# Altium PCB Main.PcbDoc
Units mm, origin at the board's own origin, x right, y up, seen from the top; angles counter-clockwise.
Board outline 99 x 64 mm, 4 copper layers (Top Layer, Ground Layer, Power Layer, Bottom Layer), stack 1.591 mm thick; 86 components, 76 nets, 354 pads, 86 vias.
Unrouted connection lines stored in the file: 1.
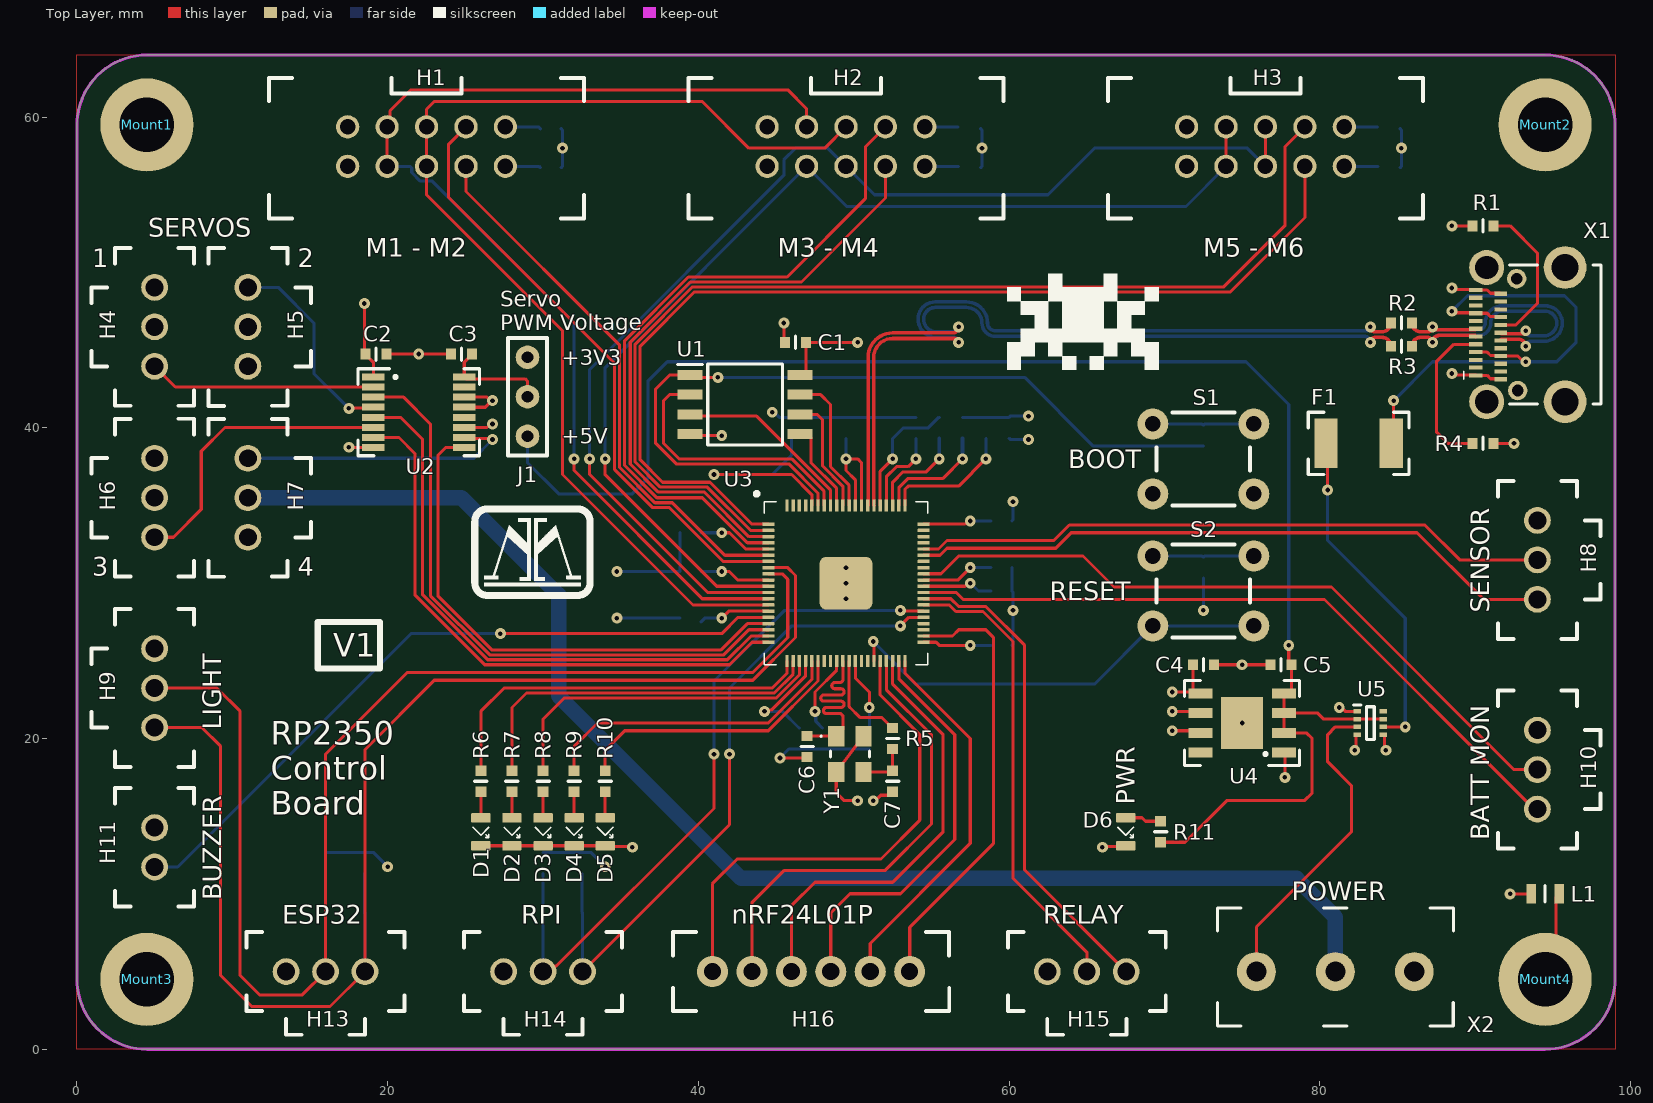
[diagram p0: Top Layer view]
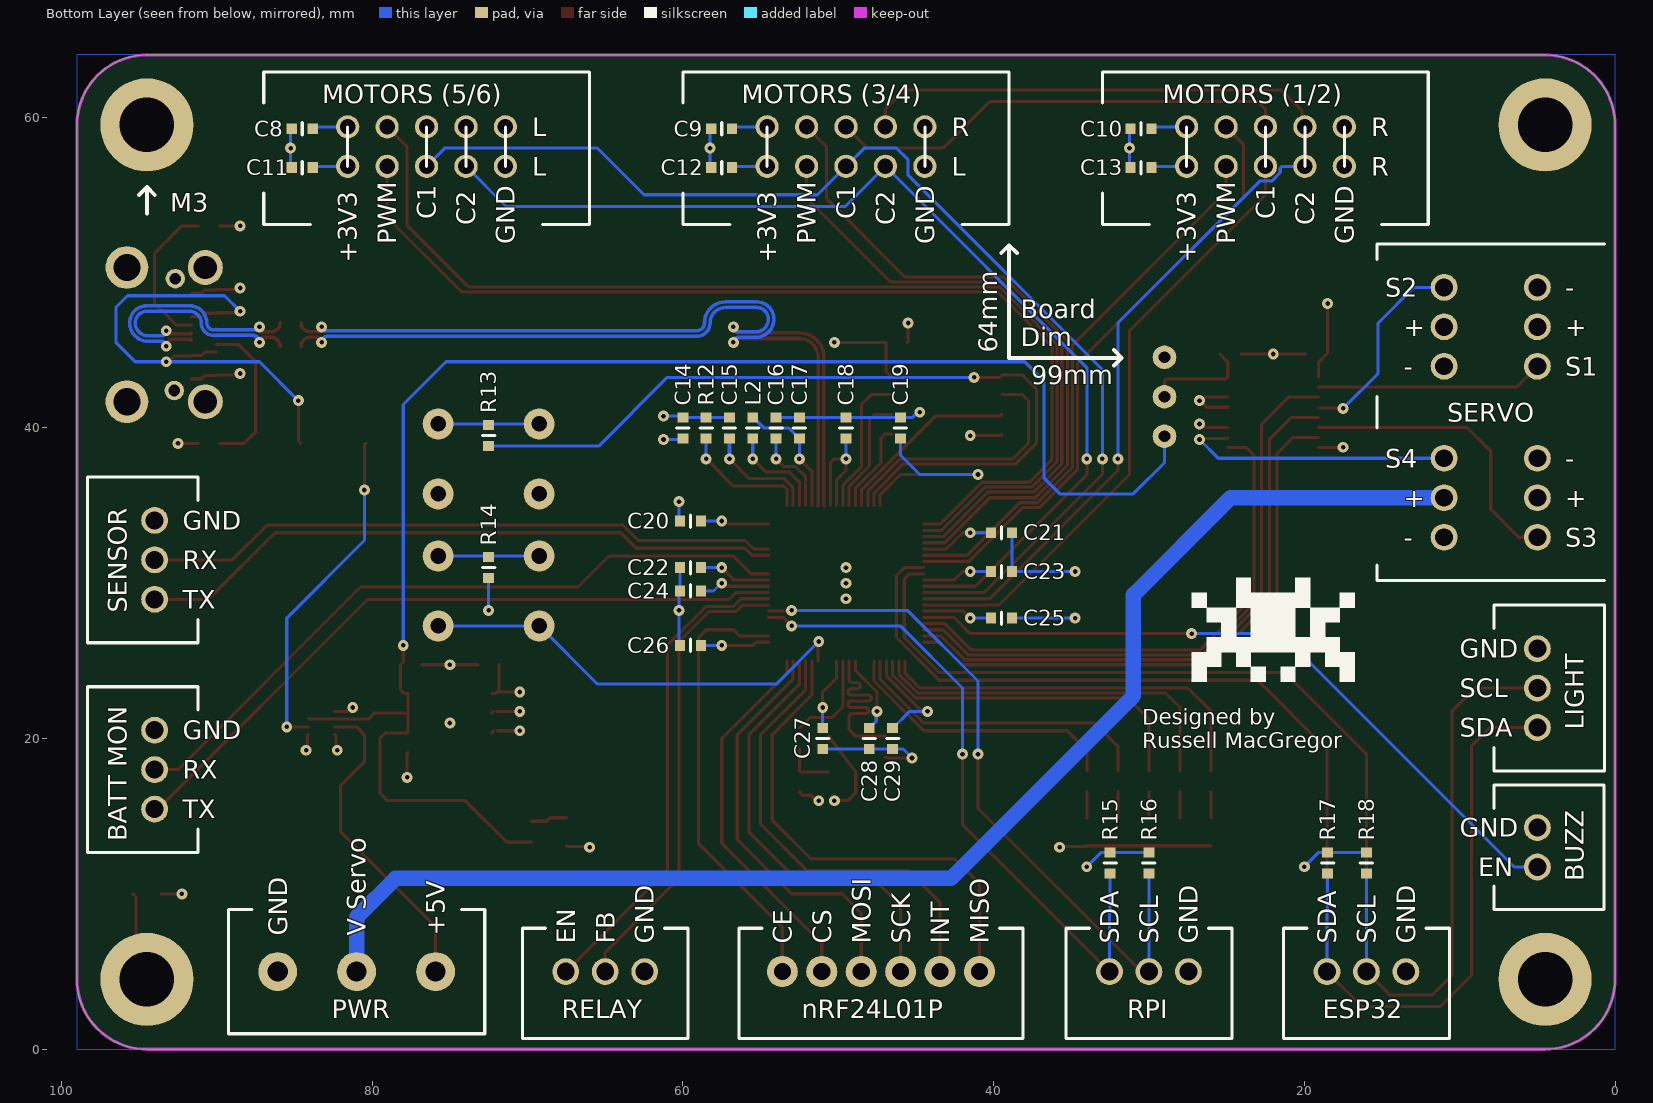
[diagram p1: Bottom Layer view, seen from below]
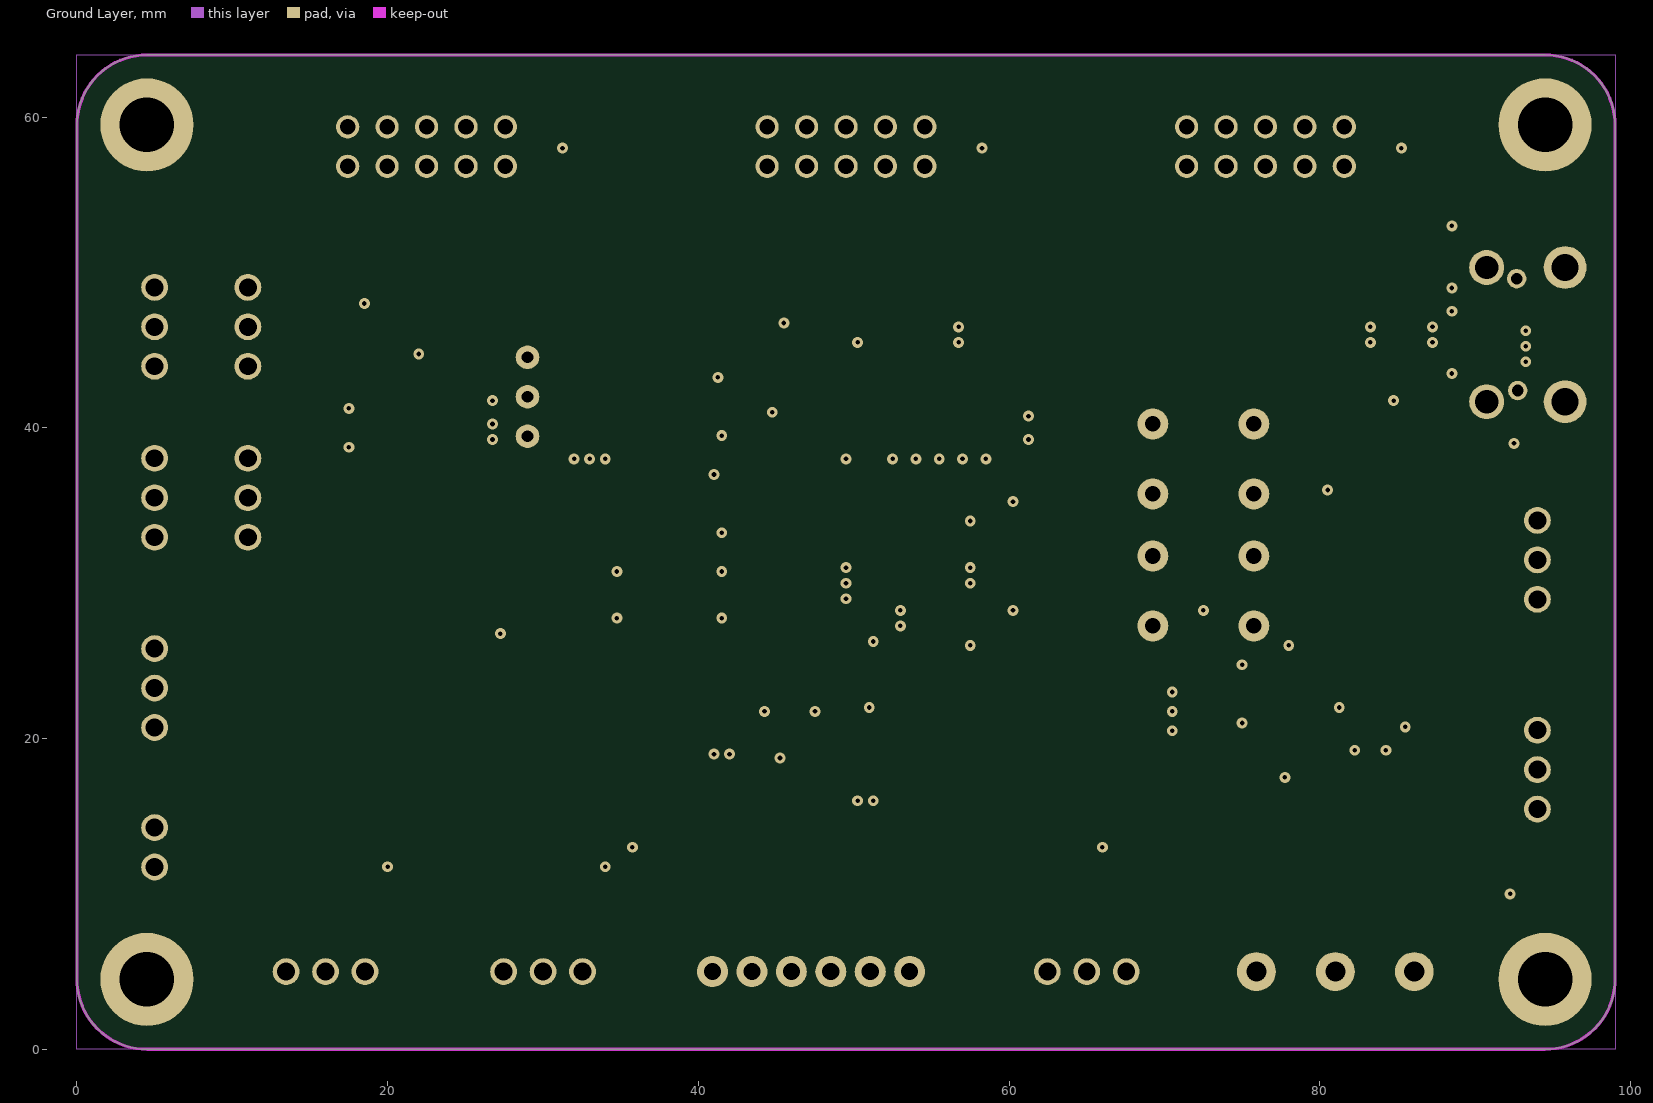
[diagram p2: Ground Layer]
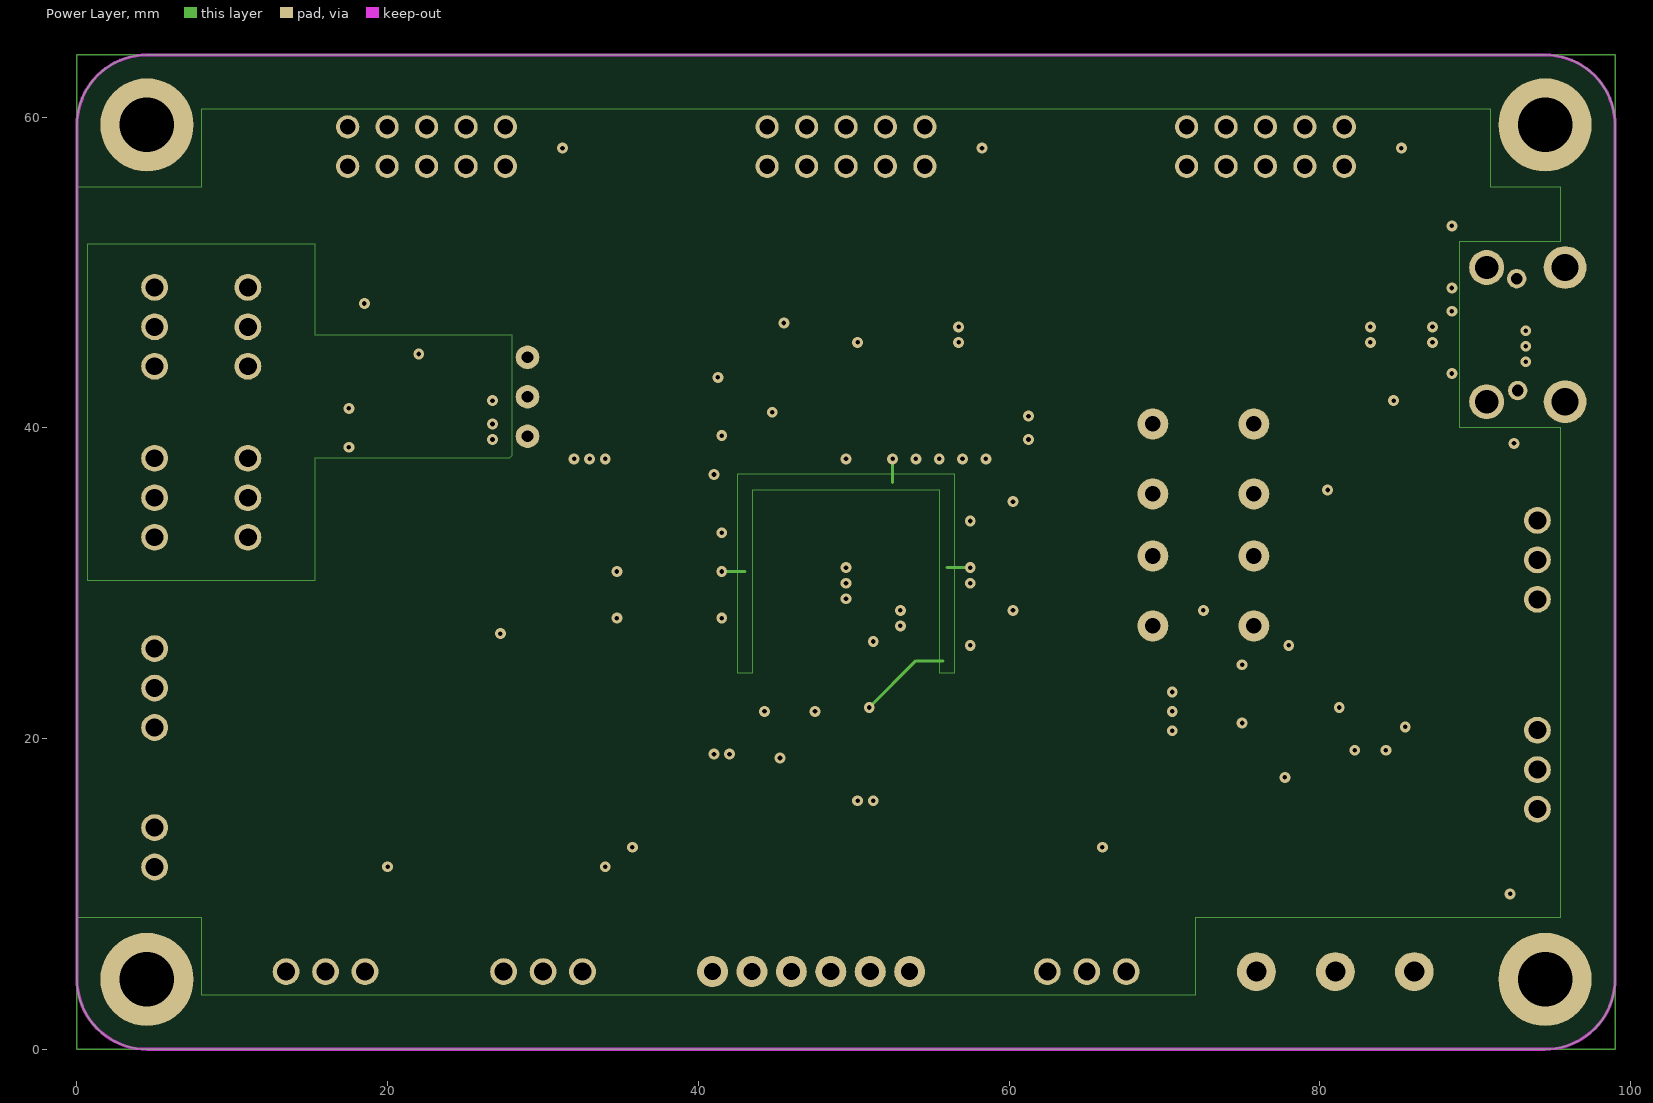
[diagram p3: Power Layer]
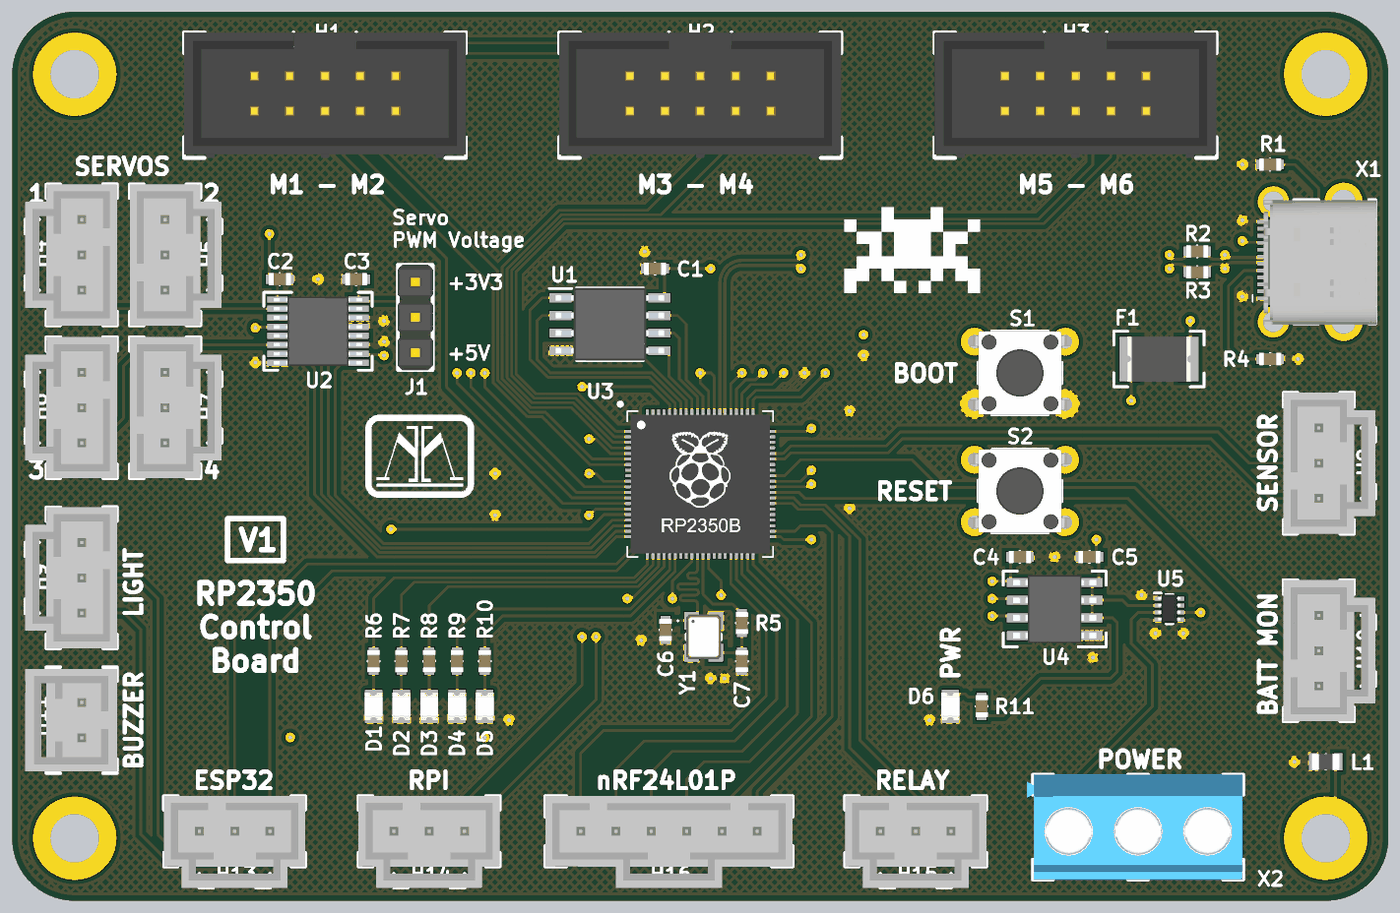
[diagram p4: 3D render of the assembled board from above, using the file's embedded part models]
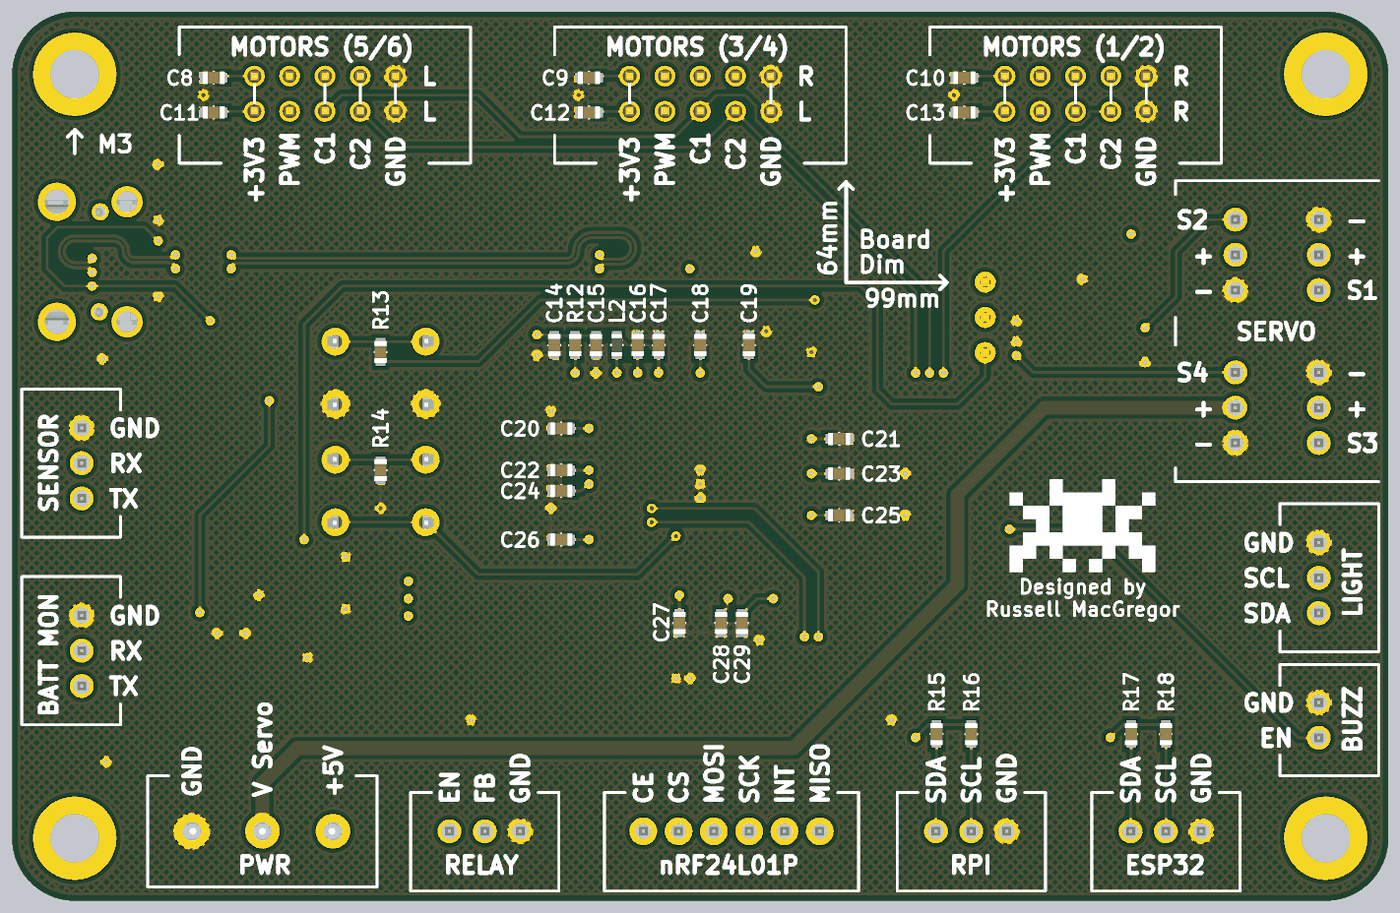
[diagram p5: 3D render of the assembled board from below, using the file's embedded part models]

## Layer stack, top to bottom
Top Solder: solder mask 0.0102, Solder Resist, Dk 3.8
Top Layer: signal copper 0.035
Dielectric 2: prepreg 0.2104, 7628*1, Dk 4.4
Ground Layer: signal copper 0.0175
Dielectric 1: dielectric 1.065, FR-4, Dk 4.8
Power Layer: signal copper 0.0175
Dielectric 3: prepreg 0.2104, 7628*1, Dk 4.4
Bottom Layer: signal copper 0.035
Bottom Solder: solder mask 0.0102, Solder Resist, Dk 3.8

## Board outline
4.5,0 cw(c4.5,4.5) 0,4.5 0,59.5 cw(c4.5,59.5) 4.5,64 94.5,64 cw(c94.5,59.5) 99,59.5 99,4.5 cw(c94.5,4.5) 94.5,0

## Design rules (kind name [scope] priority, off if disabled: settings)
BoardOutlineClearance [All] p1: gap=0.2 ignorepadtopadclearanceinfootprint=FALSE
Clearance "inPolygon Clearance" [InPolygon] p1: gap=0.3 ignorepadtopadclearanceinfootprint=TRUE // this rule ensures that every net within a polygon of a different net has a set clearance from the poly
Clearance "Different Diff Pair" [All] p2: gap=0.2 ignorepadtopadclearanceinfootprint=TRUE
Clearance "Same Diff Pair" [All] p3: gap=0.1 ignorepadtopadclearanceinfootprint=TRUE
Clearance "Different Nets" [not InAnyDifferentialPair] p4: gap=0.3 ignorepadtopadclearanceinfootprint=TRUE except(0.1: Arc-SMDPad Arc-THPad Arc-Via Arc-Text Track-SMDPad Track-THPad Track-Via Track-Text SMDPad-Text THPad-Text Via-Text Fill-Text Poly-Text Region-Text Text-Text; 0.12: Arc-Arc Arc-Track Track-Track; 0.15: SMDPad-SMDPad SMDPad-THPad SMDPad-Via THPad-THPad THPad-Via Via-Via; 0.2: Arc-Hole Track-Hole SMDPad-Hole THPad-Hole Via-Hole Fill-Hole Poly-Hole Region-Hole Text-Hole)
Clearance "Same Net" [not InAnyDifferentialPair] p5: gap=0 ignorepadtopadclearanceinfootprint=TRUE except(0.1: THPad-Via; 0.18: Arc-Arc Arc-Track Track-Track)
ComponentClearance [All] p1: gap=0.102 collisioncheckmode=3 verticalgap=0.102 showdistances=TRUE
DiffPairsRouting "Ethernet Routing" [InDifferentialPairClass('Ethernet_Pairs')] p1: maxlimit=0.25 minlimit=0.2 mostfreqgap=0.25 toplayer_maxgap=0.2 toplayer_prefgap=0.2 toplayer_minwidth=0.25 toplayer_maxwidth=0.25 toplayer_prefwidth=0.25 midlayer1_mingap=0.25 midlayer1_minwidth=0.19 midlayer1_maxwidth=0.19 midlayer1_prefwidth=0.19 midlayer2_mingap=0.25 midlayer2_minwidth=0.19 midlayer2_maxwidth=0.19 midlayer2_prefwidth=0.19 bottomlayer_maxgap=0.2 bottomlayer_prefgap=0.2 bottomlayer_minwidth=0.25 bottomlayer_maxwidth=0.25 bottomlayer_prefwidth=0.25 impedanceprofiledriven=TRUE maxuncoupledlength=12.7
DiffPairsRouting "USB Routing" [InDifferentialPairClass('USB_Pairs')] p2: maxlimit=0.291 minlimit=0.127 mostfreqgap=0.291 toplayer_maxgap=0.127 toplayer_prefgap=0.127 toplayer_minwidth=0.23 toplayer_maxwidth=0.23 toplayer_prefwidth=0.23 midlayer1_mingap=0.291 midlayer1_minwidth=0.25 midlayer1_maxwidth=0.25 midlayer1_prefwidth=0.25 midlayer2_mingap=0.291 midlayer2_minwidth=0.25 midlayer2_maxwidth=0.25 midlayer2_prefwidth=0.25 bottomlayer_maxgap=0.127 bottomlayer_prefgap=0.127 bottomlayer_minwidth=0.23 bottomlayer_maxwidth=0.23 bottomlayer_prefwidth=0.23 impedanceprofiledriven=TRUE impedanceprofileid={39EE6087-11E9-4989-B094-1B9FAF98EF18} impedanceprofilevalue=90.000000 maxuncoupledlength=12.7
DiffPairsRouting "CAN Routing" [InDifferentialPairClass('CAN_Pairs')] p3: maxlimit=0.907 minlimit=0.5 mostfreqgap=0.907 toplayer_maxgap=0.5 toplayer_prefgap=0.5 toplayer_minwidth=0.201 toplayer_maxwidth=0.201 toplayer_prefwidth=0.201 midlayer1_mingap=0.907 midlayer1_minwidth=0.155 midlayer1_maxwidth=0.155 midlayer1_prefwidth=0.155 midlayer2_mingap=0.907 midlayer2_minwidth=0.155 midlayer2_maxwidth=0.155 midlayer2_prefwidth=0.155 bottomlayer_maxgap=0.5 bottomlayer_prefgap=0.5 bottomlayer_minwidth=0.201 bottomlayer_maxwidth=0.201 bottomlayer_prefwidth=0.201 impedanceprofiledriven=TRUE maxuncoupledlength=12.7
Height [All] p1: minheight=0 maxheight=1816.048 prefheight=12.7
HoleSize [All] p1: absolutevalues=TRUE maxlimit=6.3 minlimit=0.3 maxpercent=80.000 minpercent=20.000
HoleToHoleClearance [All] p1: gap=0.25 allowstackedmicrovias=FALSE
Length [All] p1: maxlimit=43.432 minlimit=0 usedelayunits=TRUE mindelay=0.000000 maxdelay=10000.000000
MatchedLengths "Diff Pair Matched Delays" [InDifferentialPairClass('Ethernet_Pairs') or InDifferentialPairClass('USB_Pairs') or InDifferentialPairClass('CAN_Pairs')] p1: tolerance=5 checknetsindiffpair=TRUE checkdiffpairvsdiffpair=FALSE checkxsignals=FALSE checkothers=FALSE usedelayunits=TRUE delaytolerance=100.000000
MinimumAnnularRing [All] p1: minimumring=0.2
MinimumSolderMaskSliver [All] p1: minsoldermaskwidth=0
PlaneClearance "Supply Net Clearance" [InNetClass('Supply_Nets')] p1: clearance=0.5
PlaneClearance "All Nets" [All] p2: clearance=0.3
PolygonConnect "Supply Nets" [InNetClass('Supply_Nets')] p1: connectstyle=Direct reliefconductorwidth=0.3 reliefentries=4 polygonreliefangle="90 Angle" airgapwidth=0.254
PolygonConnect General [All] p2: connectstyle=Relief reliefconductorwidth=0.254 reliefentries=4 polygonreliefangle="90 Angle" airgapwidth=0.254
RoutingVias [All] p1: holewidth=0.2 width=0.35 viastyle="Through Hole" minholewidth=0.15 minwidth=0.3 maxholewidth=6.3 maxwidth=6.55
SilkToSilkClearance [All] p1: silktosilkclearance=0
SilkToSolderMaskClearance [All] p1: minsilkscreentomaskgap=0 clearancetoexposedcopper=TRUE
SolderMaskExpansion [All] p1: expansion=0.075 istentingtop=FALSE
SupplyNets "Schematic Supply Nets_9" [InNet('Vservo')] p1: voltage=0.000
SupplyNets "Schematic Supply Nets_8" [InNet('+1V1')] p2: voltage=0.000
SupplyNets "Schematic Supply Nets_6" [InNet('XIN')] p3: voltage=0.000
SupplyNets "Schematic Supply Nets_5" [InNet('+5V')] p4: voltage=0.000
SupplyNets "Schematic Supply Nets_2" [InNet('XOUT')] p5: voltage=0.000
SupplyNets "Schematic Supply Nets" [InNet('RUN')] p6: voltage=0.000
SupplyNets "Schematic Supply Nets_7" [InNet('+3V3')] p7: voltage=0.000
SupplyNets "Schematic Supply Nets_3" [InNet('GND')] p8: voltage=0.000
SupplyNets "Schematic Supply Nets_1" [InNet('Earth')] p9: voltage=0.000
UnRoutedNet [All] p1: checkbadconnections=TRUE
Width "nRF Width" [InNetClass('nRF Signal')] p1: maxlimit=0.379 minlimit=0.263 preferedwidth=0.379 toplayer_minwidth=0.379 midlayer1_maxwidth=0.263 midlayer1_prefwidth=0.263 midlayer2_maxwidth=0.263 midlayer2_prefwidth=0.263 bottomlayer_minwidth=0.379 impedanceprofiledriven=TRUE minimp=50.000000 maximp=50.000000 favimp=50.000000 checkconnectedcopper=TRUE
Width [All] p2: maxlimit=100 minlimit=0.1 preferedwidth=0.3
20 further rules are at their usual default settings.

## Classes and differential pairs
differential pair class USB_Pairs: RP2350_D RP2350_DX
net class Supply_Nets: +3V3 +5V +5V_PWR_Board +5V_USB Earth GND NetU3_8 Vservo
differential pair RP2350_DX: +RP2350_DX_P -RP2350_DX_N
differential pair RP2350_D: +RP2350_D_P -RP2350_D_N

## Components (designator, comment, footprint, x,y, rotation, side; value= is the part's Value field where it differs from the comment)
C1 "[Cap] SMD Nonpolarized" "[Cap] SMD 0603" 46.25,45.5 r180 top
C2 "[Cap] SMD Nonpolarized" "[Cap] SMD 0603" 19.25,44.75 r180 top
C3 "[Cap] SMD Nonpolarized" "[Cap] SMD 0603" 24.75,44.75 r180 top
C4 "[Cap] SMD Nonpolarized" "[Cap] SMD 0603" 72.5,24.75 r180 top
C5 "[Cap] SMD Nonpolarized" "[Cap] SMD 0603" 77.5,24.75 r0 top
C6 "[Cap] SMD Nonpolarized" "[Cap] SMD 0603" 47,19.5 r90 top
C7 "[Cap] SMD Nonpolarized" "[Cap] SMD 0603" 52.5,17.25 r90 top
C8 "[Cap] SMD Nonpolarized" "[Cap] SMD 0603" 84.5,59.25 r180 bottom
C9 "[Cap] SMD Nonpolarized" "[Cap] SMD 0603" 57.5,59.25 r180 bottom
C10 "[Cap] SMD Nonpolarized" "[Cap] SMD 0603" 30.5,59.25 r180 bottom
C11 "[Cap] SMD Nonpolarized" "[Cap] SMD 0603" 84.5,56.75 r180 bottom
C12 "[Cap] SMD Nonpolarized" "[Cap] SMD 0603" 57.5,56.75 r180 bottom
C13 "[Cap] SMD Nonpolarized" "[Cap] SMD 0603" 30.5,56.75 r180 bottom
C14 "[Cap] SMD Nonpolarized" "[Cap] SMD 0603" 60,40 r270 bottom
C15 "[Cap] SMD Nonpolarized" "[Cap] SMD 0603" 57,40 r90 bottom
C16 "[Cap] SMD Nonpolarized" "[Cap] SMD 0603" 54,40 r270 bottom
C17 "[Cap] SMD Nonpolarized" "[Cap] SMD 0603" 52.5,40 r270 bottom
C18 "[Cap] SMD Nonpolarized" "[Cap] SMD 0603" 49.5,40 r270 bottom
C19 "[Cap] SMD Nonpolarized" "[Cap] SMD 0603" 46,40 r270 bottom
C20 "[Cap] SMD Nonpolarized" "[Cap] SMD 0603" 59.5,34 r180 bottom
C21 "[Cap] SMD Nonpolarized" "[Cap] SMD 0603" 39.5,33.25 r0 bottom
C22 "[Cap] SMD Nonpolarized" "[Cap] SMD 0603" 59.5,31 r180 bottom
C23 "[Cap] SMD Nonpolarized" "[Cap] SMD 0603" 39.5,30.75 r0 bottom
C24 "[Cap] SMD Nonpolarized" "[Cap] SMD 0603" 59.5,29.5 r180 bottom
C25 "[Cap] SMD Nonpolarized" "[Cap] SMD 0603" 39.5,27.75 r0 bottom
C26 "[Cap] SMD Nonpolarized" "[Cap] SMD 0603" 59.5,26 r180 bottom
C27 "[Cap] SMD Nonpolarized" "[Cap] SMD 0603" 51,20 r90 bottom
C28 "[Cap] SMD Nonpolarized" "[Cap] SMD 0603" 48,20 r90 bottom
C29 "[Cap] SMD Nonpolarized" "[Cap] SMD 0603" 46.5,20 r90 bottom
D1 "SMD LED" "[LED] SMD 0805" 26,14 r270 top
D2 "SMD LED" "[LED] SMD 0805" 28,14 r270 top
D3 "SMD LED" "[LED] SMD 0805" 30,14 r270 top
D4 "SMD LED" "[LED] SMD 0805" 32,14 r270 top
D5 "SMD LED" "[LED] SMD 0805" 34,14 r270 top
D6 "SMD LED" "[LED] SMD 0805" 67.5,14 r270 top
F1 "[PTC] 500mA Trip" "[PTC] 500mA Trip" 82.5,39 r180 top
H1 "2x5 Shrouded" "[Header] Shrouded 2x5 Male" 22.5,58 r180 top
H2 "2x5 Shrouded" "[Header] Shrouded 2x5 Male" 49.5,58 r180 top
H3 "2x5 Shrouded" "[Header] Shrouded 2x5 Male" 76.5,58 r180 top
H4 "1x3 Male" "[Header] Shrouded 1x3 Male" 5,46.5 r90 top
H5 "1x3 Male" "[Header] Shrouded 1x3 Male" 11,46.5 r270 top
H6 "1x3 Male" "[Header] Shrouded 1x3 Male" 5,35.5 r90 top
H7 "1x3 Male" "[Header] Shrouded 1x3 Male" 11,35.5 r270 top
H8 "1x3 Male" "[Header] Shrouded 1x3 Male" 94,31.5 r270 top
H9 "1x3 Male" "[Header] Shrouded 1x3 Male" 5,23.25 r90 top
H10 "1x3 Male" "[Header] Shrouded 1x3 Male" 94,18 r270 top
H11 "1x2 Male" "[Header] Shrouded 1x2 Male" 5,13 r90 top
H13 "1x3 Male" "[Header] Shrouded 1x3 Male" 16,5 r180 top
H14 "1x3 Male" "[Header] Shrouded 1x3 Male" 30,5 r180 top
H15 "1x3 Male" "[Header] Shrouded 1x3 Male" 65,5 r180 top
H16 "[Header] Shrouded 1x6 Male" "[Header] Shrouded 1x6 Male" 47.25,5 r180 top
J1 "Thru-Hole Jumper" "[Jumper] Thru-Hole 3pin" 29,42 r270 top
L1 "652-MH2029-300Y" "[Ferrite] SMD Bead 0805 (1)" 94.5,10 r180 top
L2 "SMD Inductor" "[Inductor] SMD 0603" 55.5,40 r270 bottom
Mount1 "M3 Mount Hole" "[Mount] M3 Mount Hole" 4.5,59.5 r0 top
Mount2 "M3 Mount Hole" "[Mount] M3 Mount Hole" 94.5,59.5 r0 top
Mount3 "M3 Mount Hole" "[Mount] M3 Mount Hole" 4.5,4.5 r0 top
Mount4 "M3 Mount Hole" "[Mount] M3 Mount Hole" 94.5,4.5 r0 top
R1 "[Res] SMD Resistor" "[Res] SMD 0603" 90.5,53 r180 top
R2 "[Res] SMD Resistor" "[Res] SMD 0603" 85.25,46.75 r180 top
R3 "[Res] SMD Resistor" "[Res] SMD 0603" 85.25,45.25 r180 top
R4 "[Res] SMD Resistor" "[Res] SMD 0603" 90.5,39 r180 top
R5 "[Res] SMD Resistor" "[Res] SMD 0603" 52.5,20 r270 top
R6 "[Res] SMD Resistor" "[Res] SMD 0603" 26,17.25 r90 top
R7 "[Res] SMD Resistor" "[Res] SMD 0603" 28,17.25 r90 top
R8 "[Res] SMD Resistor" "[Res] SMD 0603" 30,17.25 r90 top
R9 "[Res] SMD Resistor" "[Res] SMD 0603" 32,17.25 r90 top
R10 "[Res] SMD Resistor" "[Res] SMD 0603" 34,17.25 r90 top
R11 "[Res] SMD Resistor" "[Res] SMD 0603" 69.75,14 r270 top
R12 "[Res] SMD Resistor" "[Res] SMD 0603" 58.5,40 r90 bottom
R13 "[Res] SMD Resistor" "[Res] SMD 0603" 72.5,39.5 r270 bottom
R14 "[Res] SMD Resistor" "[Res] SMD 0603" 72.5,31 r270 bottom
R15 "[Res] SMD Resistor" "[Res] SMD 0603" 32.5,12 r90 bottom
R16 "[Res] SMD Resistor" "[Res] SMD 0603" 30,12 r90 bottom
R17 "[Res] SMD Resistor" "[Res] SMD 0603" 18.5,12 r90 bottom
R18 "[Res] SMD Resistor" "[Res] SMD 0603" 16,12 r90 bottom
S1 "Standard pushbutton" "[Switch] Pushbutton" 72.5,38 r0 top
S2 "Standard pushbutton" "[Switch] Pushbutton" 72.5,29.5 r180 top
U1 "W25Q128JVS" "[Mem] 16Mb Flash Memory" 43,41.5 r0 top
U2 "[IC] Level Shifter Unidirectional 3-18V" "[IC] Level Shifter Unidirectional 3-18V" 22,41 r0 top
U3 "RP2350B" "[MCU] RP2350B" 49.5,30 r0 top
U4 "3V3 1.5A" "[Reg Lin] 3V3 Regulator 1.5A" 75,21 r180 top
U5 "PWR ORing" "[IC] Power ORing Controller" 83.25,21 r0 top
X1 "USB-C" "[Port] USB-C" 94,46 r90 top
X2 "3pin Screw Terminal" "[Screw Terminal] 3pin 5mm" 81,5 r0 top
Y1 "12MHz" "[XTAL] SMD 12MHz" 49.75,19 r270 top

## Footprints (in the part's own frame and the unit in brackets; to place one, negate y for a bottom-side part, rotate by r counter-clockwise, add the part's x,y. Pads: shape width x height; smd on the part's side, far side on the other; paste and mask are expansions set on the pad)
"[Cap] SMD 0603" [mm]
  rect 0.65x0.7 smd: 1(-0.675,0) 2(0.675,0)
  silkscreen extent 0,-0.4 0,0.4, body extent -0.8,-0.45 0.8,0.45, height 0.8
"[Ferrite] SMD Bead 0805 (1)" [mm]
  rect 0.6x1.25 smd: 1(-0.9,0) 2(0.9,0)
  silkscreen extent 0,-0.53 0,0.53, body extent -1,-0.6 1,0.6, height 1.1
"[Header] Shrouded 1x2 Male" [mm]
  round 1.725 hole 1.15: 1(-1.27,0) 2(1.27,0)
  silkscreen extent -3.81,-2.54 3.81,2.54, body extent -3.68,-2.54 3.68,4.06, height 11.71
"[Header] Shrouded 1x3 Male" [mm] "070543-0037 / Mates with 005057-9403"
  round 1.725 hole 1.15: 1(-2.54,0) 2(0,0) 3(2.54,0)
  silkscreen extent -5.08,-2.54 5.09,4.06, body extent -5.08,-2.54 5.08,4.06, height 11.67
"[Header] Shrouded 1x6 Male" [mm]
  round 2 hole 1.1: 1(-6.35,0) 2(-3.81,0) 3(-1.27,0) 4(1.27,0) 5(3.81,0) 6(6.35,0)
  silkscreen extent -8.9,-2.54 8.9,2.54, body extent -8.89,-2.54 8.89,4.06, height 11.49
"[Header] Shrouded 2x5 Male" [mm]
  round 1.5 hole 1: 1(-5.08,-1.37) 2(-5.08,1.17) 3(-2.54,-1.37) 4(-2.54,1.17) 5(0,-1.37) 6(0,1.17) 7(2.54,-1.37) 8(2.54,1.17) 9(5.08,-1.37) 10(5.08,1.17)
  silkscreen extent -10.15,-4.52 10.15,4.52, body extent -10.15,-4.52 10.15,4.52, height 8.8
"[IC] Level Shifter Unidirectional 3-18V" [mm]
  rect 1.45x0.45 smd: 1(-2.925,2.275) 2(-2.925,1.625) 3(-2.925,0.975) 4(-2.925,0.325) 5(-2.925,-0.325) 6(-2.925,-0.975) 7(-2.925,-1.625) 8(-2.925,-2.275) 9(2.925,-2.275) 10(2.925,-1.625) 11(2.925,-0.975) 12(2.925,-0.325) 13(2.925,0.325) 14(2.925,0.975) 15(2.925,1.625) 16(2.925,2.275)
  silkscreen extent -3.9,-2.8 3.9,2.8, body extent -3.2,-2.5 3.2,2.5, height 1.2
"[IC] Power ORing Controller" [mm]
  rect 0.475x0.3 smd: 1(-0.838,0.75) 2(-0.838,0.25) 3(-0.838,-0.25) 4(-0.838,-0.75) 5(0.838,-0.75) 6(0.838,-0.25) 7(0.838,0.25) 8(0.838,0.75)
  silkscreen extent -1.07,-1.05 0.25,1.15, body extent -0.8,-1.02 0.8,1.08, height 0.6
"[Inductor] SMD 0603" [mm]
  rect 0.65x0.7 smd: 1(-0.675,0) 2(0.675,0)
  silkscreen extent 0,-0.4 0,0.4, body extent -0.8,-0.4 0.8,0.4, height 0.95
"[Jumper] Thru-Hole 3pin" [mil]
  round 60 hole 30: 1(-100,0) 2(0,0) 3(100,0)
  silkscreen extent -149,-49 149,49, body extent -150,-50 150,50, height 374
"[LED] SMD 0805" [mm]
  rrect20% 0.6x1.25 smd: 1(-0.9,0) 2(0.9,0)
  silkscreen extent -0.28,-0.51 0.37,0.51, body extent -1,-0.65 1,0.65, height 0.8
"[MCU] RP2350B" [mm]
  rrect25% 0.78x0.22 smd: 1(-5,3.8) 2(-5,3.4) 3(-5,3) 4(-5,2.6) 5(-5,2.2) 6(-5,1.8) 7(-5,1.4) 8(-5,1) 9(-5,0.6) 10(-5,0.2) 11(-5,-0.2) 12(-5,-0.6) 13(-5,-1) 14(-5,-1.4) 15(-5,-1.8) 16(-5,-2.2) 17(-5,-2.6) 18(-5,-3) 19(-5,-3.4) 20(-5,-3.8) 41(5,-3.8) 42(5,-3.4) 43(5,-3) 44(5,-2.6) 45(5,-2.2) 46(5,-1.8) 47(5,-1.4) 48(5,-1) 49(5,-0.6) 50(5,-0.2) 51(5,0.2) 52(5,0.6) 53(5,1) 54(5,1.4) 55(5,1.8) 56(5,2.2) 57(5,2.6) 58(5,3) 59(5,3.4) 60(5,3.8)
  rrect25% 0.22x0.78 smd: 21(-3.8,-5) 22(-3.4,-5) 23(-3,-5) 24(-2.6,-5) 25(-2.2,-5) 26(-1.8,-5) 27(-1.4,-5) 28(-1,-5) 29(-0.6,-5) 30(-0.2,-5) 31(0.2,-5) 32(0.6,-5) 33(1,-5) 34(1.4,-5) 35(1.8,-5) 36(2.2,-5) 37(2.6,-5) 38(3,-5) 39(3.4,-5) 40(3.8,-5) 61(3.8,5) 62(3.4,5) 63(3,5) 64(2.6,5) 65(2.2,5) 66(1.8,5) 67(1.4,5) 68(1,5) 69(0.6,5) 70(0.2,5) 71(-0.2,5) 72(-0.6,5) 73(-1,5) 74(-1.4,5) 75(-1.8,5) 76(-2.2,5) 77(-2.6,5) 78(-3,5) 79(-3.4,5) 80(-3.8,5)
  rrect25% 3.4x3.4 smd: Pad(0,0)
  silkscreen extent -5.85,-5.25 5.25,5.85, body extent -5.05,-5.05 5.05,5.05, height 0.96
"[Mem] 16Mb Flash Memory" [mm] "W25Q128JVSIQ TR"
  rect 1.6x0.65 smd: 1(-3.55,1.905) 2(-3.55,0.635) 3(-3.55,-0.635) 4(-3.55,-1.905) 5(3.55,-1.905) 6(3.55,-0.635) 7(3.55,0.635) 8(3.55,1.905)
  silkscreen extent -4.35,-2.61 2.4,2.62, body extent -3.9,-2.61 3.9,2.62, height 1.95
"[Mount] M3 Mount Hole" [mm] "Place at least 4.5mm from board edge. Plated."
  round 6 hole 3.5: 1(0,0)
"[Port] USB-C" [mm]
  rect 0.27x0.9 smd: A1(-2.625,3.965) A2(-2.125,3.965) A3(-1.625,3.965) A4(-1.125,3.965) A5(-0.625,3.965) A6(-0.125,3.965) A7(0.375,3.965) A8(0.875,3.965) A9(1.375,3.965) A10(1.875,3.965) A11(2.375,3.965) A12(2.875,3.965)
  rect 0.27x0.8 smd: B1(2.625,2.365) B2(2.125,2.365) B3(1.625,2.365) B4(1.125,2.365) B5(0.625,2.365) B6(0.125,2.365) B7(-0.375,2.365) B8(-0.875,2.365) B9(-1.375,2.365) B10(-1.875,2.365) B11(-2.375,2.365) B12(-2.875,2.365)
  round 2.75 hole 1.75: MH(-4.32,-1.785) MH(4.32,-1.785)
  round 2.25 hole 1.5: MH(-4.32,3.265) MH(4.32,3.265)
  round 1.25 hole 0.75: MH(-3.6,1.265) MH(3.6,1.33)
  silkscreen extent -4.47,-4.09 4.47,4.75, body extent -4.51,-4.16 4.43,4.01, height 2.92
"[PTC] 500mA Trip" [mm] "Part #: MF-MSMF050-2"
  rect 1.5x3.2 smd: 1(-2.1,0) 2(2.1,0)
  silkscreen extent -3.25,-2 3.25,2, body extent -2.27,-1.62 2.27,1.62, height 1.1
"[Reg Lin] 3V3 Regulator 1.5A" [mm]
  rect 1.525x0.65 smd: 1(-2.688,1.905) 2(-2.688,0.635) 3(-2.688,-0.635) 4(-2.688,-1.905) 5(2.688,-1.905) 6(2.688,-0.635) 7(2.688,0.635) 8(2.688,1.905)
  rect 2.71x3.35 smd: 9(0,0)
  silkscreen extent -3.7,-2.73 3.7,2.73, body extent -3,-2.45 3,2.45, height 1.5
"[Res] SMD 0603" [mm]
  rect 0.65x0.7 smd: 1(-0.675,0) 2(0.675,0)
  silkscreen extent 0,-0.4 0,0.4, body extent -0.8,-0.45 0.8,0.45, height 0.8
"[Screw Terminal] 3pin 5mm" [mm]
  round 2.5 hole 1.3: 1(-5.08,0) 2(0,0) 3(5.08,0)
  silkscreen extent -7.59,-3.5 7.59,4.1, body extent -8,-3.5 7.5,4.1, height 10
"[Switch] Pushbutton" [mm] "(Regular pushbutton)"
  round 2 hole 1: 1(-3.25,2.25) 1(3.25,2.25) 2(-3.25,-2.25) 2(3.25,-2.25)
  silkscreen extent -3,-3 3,3, body extent -3.85,-3 3.85,3, height 4.95
"[XTAL] SMD 12MHz" [mm]
  rect 1.3x1.05 smd: 1(-1.15,-0.875) 2(1.15,-0.875) 3(1.15,0.875) 4(-1.15,0.875)
  silkscreen extent -1.2,-1.9 0.2,1.25, body extent -1.6,-1.25 1.6,1.25, height 0.75

## Part data
C1 C2 C3 C16 C18 C19 C20 C21 C23 C24 C25 C26 C27 C28 C29: Capacitance=100nF, Size Package=0603, Supplier Part Number 1=311-1088-6-ND, Tolerance=5%, Voltage=6.3V, Supplier 1=DigiKey
C4 C5 C8 C9 C10 C11 C12 C13: Capacitance=10uF, Size Package=0603, Supplier Part Number 1=1276-1192-1-ND, Tolerance=5%, Voltage=10V, Supplier 1=DigiKey
C6 C7: Capacitance=15pF, Size Package=0603, Supplier Part Number 1=490-16416-1-ND, Tolerance=1%, Voltage=6.3V, Supplier 1=DigiKey
C14 C15 C17 C22: Capacitance=4.7uF, Size Package=0603, Supplier Part Number 1=490-7203-1-ND, Tolerance=10%, Voltage=6.3V, Supplier 1=DigiKey
D1: library part "[LED] SMD", "Generic", Color=Green, Size Package=0805, Supplier Part Number 1=475-LGR971-KN-1CT-ND, Supplier 1=DigiKey
D2: library part "[LED] SMD", "Generic", Color=Yellow, Size Package=0805, Supplier Part Number 1=475-LYR976-PS-36-0-20-R18CT-ND, Supplier 1=DigiKey
D3: library part "[LED] SMD", "Generic", Color=Red, Size Package=0805, Supplier Part Number 1=475-LSR976-NR-1CT-ND, Supplier 1=DigiKey
D4 D5: library part "[LED] SMD", "Generic", Color=Blue, Size Package=0805, Supplier Part Number 1=732-4982-1-ND, Supplier 1=DigiKey
D6: library part "[LED] SMD", "Generic", Color=Green, Size Package=0805, Supplier Part Number 1=475-LGR971-KN-1DKR-ND, Supplier 1=DigiKey
F1: "MF-MSMF050-2", Size Package=1812, Supplier Part Number 1=MF-MSMF050-2DKR-ND, Trip Current=500mA, Supplier 1=DigiKey
H1 H2 H3: library part "[Header] Shrouded 2x5 Male", "BHR-10-VUA", Supplier Part Number 1=2057-BHR-10-VUA-ND, Supplier 1=DigiKey
H4 H5 H6 H7 H8 H9 H10 H13 H14 H15: library part "[Header] Shrouded 1x3 Male", "070543-0037 / Mates with 005057-9403", Supplier Part Number 1=WM4825-ND, Supplier 1=DigiKey
  H4 H5 H6 H7 H8 H9 H13 H14 H15: Supplier 2=DigiKey, Supplier Part Number 2=WM2901-ND
H11: library part "[Header] Shrouded 1x2 Male", "0705430036 / Mates with 0050579402", Supplier Part Number 1=WM4824-ND, Supplier 1=DigiKey, Supplier 2=DigiKey, Supplier Part Number 2=WM2900-ND
H16: "0705430005 / Mates with 0050579406", Supplier Part Number 1=WM4804-ND, Supplier 1=DigiKey, Supplier 2=DigiKey, Supplier Part Number 2=WM2904-ND
J1: library part "[Jump] Thru-Hole 3pin", "Clip Jumper", NO/NC="2,3 NC"
L1: library part "[Ferrite] SMD Ferrite Bead (1)", Res @ Freq="30 @ 100MHz", Size Package=0805, Supplier Part Number 1=MH2029-300YCT-ND, Supplier 1=DigiKey
L2: library part "[Inductor] SMD Inductor", Inductance=10uH, Size Package=0603, Supplier Part Number 1=553-BSCY00160808100MCPCT-ND, Supplier 1=DigiKey
Mount1 Mount2 Mount3 Mount4: library part "[Mount] M3 Mount Hole", "Place at least 4.5mm from board edge. Plated."
R1 R4: "Generic", Resistance=5.1k, Size Package=0603, Supplier Part Number 1=311-5.10KHRDKR-ND, Tolerance=1%, Supplier 1=DigiKey
R2 R3: "Generic", Resistance=27, Size Package=0603, Supplier Part Number 1=749-1631-1-ND, Tolerance=1%, Supplier 1=DigiKey
R5 R9 R10 R13 R14: "Generic", Resistance=1k, Size Package=0603, Supplier Part Number 1=RMCF0603FT1K00DKR-ND, Tolerance=5%, Supplier 1=DigiKey
R6 R7 R8: "Generic", Resistance=220, Size Package=0603, Supplier Part Number 1=311-220HRCT-ND, Tolerance=1%, Supplier 1=DigiKey
R11: "Generic", Resistance=220, Size Package=0603, Supplier Part Number 1=A129741CT-ND, Tolerance=5%, Supplier 1=DigiKey
R12: "Generic", Resistance=33, Size Package=0603, Supplier Part Number 1=RR08Q33DCT-ND, Tolerance=1%, Supplier 1=DigiKey
R15 R16 R17 R18: "Generic", Resistance=2k, Size Package=0603, Supplier Part Number 1=P2.0KBDCT-ND, Tolerance=5%, Supplier 1=DigiKey
S1 S2: library part "[Switch] Pushbutton", Supplier Part Number 1=450-1650-ND, Supplier 1=DigiKey
U1: library part "[Mem] 16Mb Flash Memory", "W25Q128JVSIQ TR", Supplier Part Number 1=256-W25Q128JVSIQTRCT-ND, Supplier 1=DigiKey
U2: "MC14504BDTR2G", Supplier Part Number 1=MC14504BDTR2GOSCT-ND, Supplier 1=DigiKey
U3: library part "[MCU] RP2350B", "QFN-80 Package", Supplier Part Number 1=2648-SC1510-A4CT-ND, Supplier 1=DigiKey
U4: library part "[Reg Lin] 3V3 Regulator 1.5A", "AP7362A-33SP-13", Supplier Part Number 1=AP7362A-33SP-13DICT-ND, Supplier 1=DigiKey
U5: library part "[IC] Power ORing Controller", Supplier Part Number 1=296-LM66200DRLRCT-ND, Supplier 1=DigiKey
X1: library part "[Port] USB Type-C", Supplier Part Number 1=670-3104-1-ND, Supplier 1=DigiKey
X2: library part "[Screw Terminal] 3pin", Supplier Part Number 1=102-6162-ND, Supplier 1=DigiKey
Y1: library part "[XTAL] SMD 12MHz", "815-ABM8-272-T3", Supplier Part Number 1=535-ABM8-272-T3CT-ND, Supplier 1=DigiKey

## Via types
v1: diameter 0.7, hole 0.3, Top Layer to Bottom Layer, 86 vias

## Nets (pads, with @x,y where several pads share a name; then routed paths per layer and width w, separated by ;. In a path a pad name is that pad's centre, name@x,y a point inside that pad or via, vN(x,y) a via of type N, cw(c..) or ccw(c..) an arc to the next point about the centre after c; other vN are vias at no path point)
+1V1: C17.2 C22.2 C23.2 C27.2 L2.1 U3.10 U3.32 U3.51 U3.65 | length 32.6
  Top Layer w0.2: v1(41.5,30.75) 41.505,30.745 42.005,30.745 42.55,30.2 U3.10 ; U3.32 50.1,23.9 51,23 v1(51,22) ; U3.65 51.7,37.2 v1(52.5,38) ; U3.51 56.7,30.2 v1(57.5,31)
  Power Layer w0.2: v1(41.5,30.75) 43,30.75 ; v1(51,22) 54,25 55.75,25 ; 52.5,36.5 v1(52.5,38) ; 56,31 v1(57.5,31)
  Bottom Layer w0.2: C23.2 v1(41.5,30.75) ; C27.2 v1(51,22) ; v1(52.5,38) C17.2 52.525,39.325 53.2,40 54.8,40 55.475,40.675 L2.1 ; v1(57.5,31) C22.2
+3V3: C1.1 C2.2 C4.2 C8.2 C9.2 C10.2 C11.2 C12.2 C13.2 C14.1 C15.2 C16.2 C18.2 C19.2 C20.2 C21.2 C24.2 C25.2 C26.2 C28.2 C29.2 H1.1 H1.2 H2.1 H2.2 H3.1 H3.2 J1.1 R12.2 R15.2 R16.2 R17.2 R18.2 U1.8 U2.1 U3.5 U3.15 U3.24 U3.29 U3.41 U3.50 U3.60 U3.64 U3.68 U3.69 U3.76 U4.5 U4.6 U4.7 | length 107
  Top Layer w0.2: v1(18.5,48) 18.5,44.825 C2.2 ; C2.2@18.575,44.725 19.075,44.225 U2.1 U2.1@19.072,43.278 ; v1(41,37) 46,37 47.3,35.7 U3.76 ; v1(41.5,27.75) 41.95,28.2 U3.15 ; v1(41.5,33.25) 41.505,33.245 42.005,33.245 43.05,32.2 U3.5 ; v1(44.25,21.75) 44.327,21.827 44.684,21.827 44.743,21.885 46.9,24.042 U3.24 ; U1.8 46.7,43.405 46.925,43.63 C1.1 v1(50.25,45.5) ; v1(47.5,21.75) 47.5,23 48.9,24.4 U3.29 ; U3.69 50.1,36.65 49.5,37.25 v1(49.5,38) 50.25,38 50.5,37.75 U3.68 ; U3.64 52.1,36.85 52.75,37.5 53.5,37.5 v1(54,38) ; U3.41 55.3,26.2 55.5,26 v1(57.5,26) ; U3.50 57.165,29.8 57.365,30 v1(57.5,30) ; U3.60 57.165,33.8 57.365,34 v1(57.5,34) ; v1(70.5,20.5) U4.7@71.927,20.5 ; v1(70.5,21.75) U4.6@71.947,21.75 ; v1(70.5,23) U4.5@71.967,23 ; C4.2 71.825,23.13 72.05,22.905 U4.5 ; U4.7@72.177,20.5 U4.7 ; U4.6@72.197,21.75 U4.6
  Bottom Layer w0.2: R18.2 R17.2 19.075,12.675 v1(20,11.75) ; H1.2 29.745,56.83 C13.2 ; H1.1 29.705,59.37 C10.2 ; R16.2 R15.2 33.075,12.675 v1(34,11.75) ; C25.2@40.175,27.5 40.175,27.525 40.4,27.75 v1(41.5,27.75) ; C21.2 v1(41.5,33.25) ; v1(41,37) 44.75,37 46,38.25 C19.2 ; v1(44.25,21.75) 45.4,21.75 46.475,20.675 C29.2 ; v1(47.5,21.75) 47.555,21.695 47.555,21.12 47.75,20.925 47.75,20.9 47.975,20.675 C28.2 ; v1(49.5,38) C18.2 ; v1(54,38) C16.2 ; H2.2 C12.2@56.745,56.83 ; H2.1 C9.2@56.705,59.37 ; C15.2 R12.2 C14.1 60.075,40.75 v1(61.25,40.75) ; v1(57.5,26) C26.2 ; v1(57.5,30) 57.532,30 58.032,29.5 C24.2 ; v1(57.5,34) C20.2 ; H3.2 C11.2@83.745,56.83 ; H3.1 C8.2@83.705,59.37
+5V: C5.2 J1.3 R11.2 U4.2 U4.3 U4.4 U5.2 U5.7 | length 104.5
  Top Layer w0.2: R11.2 71.325,13.325 74,16 79,16 79.5,16.5 79.5,20 79.135,20.365 U4.2 U4.3 ; v1(78,26) 78,24.925 C5.2 78.175,23.13 77.95,22.905 U4.4 U4.3 ; U5.7 U5.2 80.25,21.25 79.865,21.635 U4.3
  Bottom Layer w0.2: J1.3 29,37.75 31,35.75 35.75,35.75 36.75,36.75 36.75,43 38,44.25 75.25,44.25 78,41.5 v1(78,26)
+5V_PWR_Board: U5.3 X2.1 | length 21
  Top Layer w0.2: X2.1@75.92,4.5 75.92,7.88 82.04,14 82.04,16.96 80.5,18.5 80.5,20.25 81,20.75 U5.3
+5V_USB: F1.2 U5.6 | length 21.8
  Top Layer w0.2: F1.2 80.5,38.9 v1(80.5,36) ; U5.6 v1(85.5,20.75)
  Bottom Layer w0.2: v1(80.5,36) 80.5,32.75 85.5,27.75 v1(85.5,20.75)
+5V_USB_UNFUSED: F1.1 X1.A4 X1.A9 X1.B4 X1.B9 | length 33.9
  Top Layer w0.2: F1.1 84.75,39.15 v1(84.75,41.75) ; v1(88.5,47.5) 88.59,47.41 90,47.41 X1.A9 90.765,47.375 90.98,47.16 91.6,47.16 X1.B4 ; X1.A4 90.765,44.875 90.98,44.66 91.6,44.66 X1.B9 92.74,44.625 93.115,44.25 v1(93.25,44.25)
  Bottom Layer w0.2: v1(84.75,41.75) 87.25,44.25 v1(93.25,44.25) 95.25,44.25 96.5,45.5 96.5,47.75 95.75,48.5 89.5,48.5 v1(88.5,47.5)
Buzzer: H11.1 U3.16 | length 46.2
  Top Layer w0.2: v1(27.25,26.75) 41.5,26.75 42.55,27.8 U3.16
  Bottom Layer w0.2: H11.1 6.48,11.73 21.5,26.75 v1(27.25,26.75)
Earth: L1.1 Mount1.1 Mount2.1 Mount3.1 Mount4.1 X1.MH | length 5.9
  Top Layer w0.2: Mount4.1 95.2,5.2 95.2,9.8 L1.1
GND: C1.2 C2.1 C3.2 C4.1 C5.1 C6.1 C7.1 C8.1 C9.1 C10.1 C11.1 C12.1 C13.1 C14.2 C15.1 C16.1 C17.1 C18.1 C19.1 C20.1 C21.1 C22.1 C23.1 C24.1 C25.1 C26.1 C27.1 C28.1 C29.1 D1.2 D2.2 D3.2 D4.2 D5.2 D6.2 H1.9 H1.10 H2.9 H2.10 H3.9 H3.10 H4.3 H5.3 H6.3 H7.3 H8.1 H9.3 H10.1 H11.2 H13.3 H14.3 H15.3 L1.2 R1.2 R4.1 R14.2 S1.2 U1.4 U2.8 U2.11 U2.13 U2.14 U3.62 U3.Pad U4.1 U4.9 U5.1 U5.4 U5.5 X1.A1 X1.A12 X1.B1 X1.B12 X2.3 Y1.2 Y1.4 | length 105.4
  Top Layer w0.2: v1(17.5,38.75) 17.512,38.738 19.063,38.738 U2.8 ; C2.1 v1(22,44.75) C3.2 ; U2.11 26.39,40.025 26.615,40.25 v1(26.75,40.25) ; U2.13 26.284,41.325 26.709,41.75 v1(26.75,41.75) 26.615,41.75 26.39,41.975 U2.14 ; D1.2 D2.2 D3.2 D4.2 D5.2 34.05,13.05 35.7,13.05 v1(35.75,13) ; U1.4 39.546,39.5 v1(41.5,39.5) ; v1(45.25,18.75) 46.75,18.75 C6.1 ; v1(45.5,46.75) 45.5,45.575 C1.2 ; v1(50.25,16) 49.385,16 48.875,16.51 Y1.2 49.3,18.4 50.2,19.6 Y1.4 ; v1(51.25,16) 51.385,16 51.735,16.35 52.275,16.35 C7.1 ; U3.62 52.9,36.15 53.5,36.75 55.75,36.75 v1(57,38) ; v1(66,13) 66.05,13.05 67.45,13.05 D6.2 ; C4.1 v1(75,24.75) C5.1 ; U4.1 77.75,19.033 v1(77.75,17.5) ; v1(81.25,22) 81.385,22 81.635,21.75 U5.1 ; v1(82.25,19.25) 82.331,19.331 82.331,20.2 82.381,20.25 U5.4 ; U5.5 84.119,20.25 84.169,20.2 84.169,19.331 v1(84.25,19.25) ; v1(88.5,43.5) 88.59,43.41 90,43.41 X1.A1 90.765,43.375 90.98,43.16 91.6,43.16 X1.B12 ; v1(88.5,49) 88.59,48.91 90,48.91 X1.A12 90.765,48.875 90.98,48.66 91.6,48.66 X1.B1 ; v1(88.5,53) R1.2 ; R4.1 v1(92.5,39) ; v1(92.25,10) L1.2
  Bottom Layer w0.2: C13.1 31.25,56.825 v1(31.25,58) 31.25,59.175 C10.1 ; v1(34.75,27.75) C25.1 ; v1(34.75,30.75) C23.1 C21.1 ; v1(44.75,41) 44.885,41 45.21,40.675 C19.1 C18.1 C17.1 C16.1 ; v1(45.25,18.75) 45.825,19.325 C29.1 C28.1 C27.1 ; C12.1 58.25,56.825 v1(58.25,58) 58.25,59.175 C9.1 ; C14.2 60.075,39.25 v1(61.25,39.25) ; C26.1 60.25,26.075 v1(60.25,28.25) 60.25,29.425 C24.1 C22.1 ; C20.1 60.25,34.075 v1(60.25,35.25) ; v1(72.5,28.25) R14.2 ; C11.1 85.25,56.825 v1(85.25,58) 85.25,59.175 C8.1
  Bottom Layer w0.23: v1(57,38) C15.1
  other v1: 75,21 49.5,29 49.5,30 49.5,31
LED1: R6.2 U3.21 | length 25.3
  Top Layer w0.2: R6.2 26,21.75 27.5,23.25 44.75,23.25 45.7,24.2 U3.21
LED2: R7.2 U3.22 | length 23.9
  Top Layer w0.2: R7.2 28,22 28.93,22.93 44.883,22.93 46.1,24.147 U3.22
LED3: R8.2 U3.23 | length 21.9
  Top Layer w0.2: R8.2 30,21.25 31.36,22.61 45.015,22.61 46.5,24.095 U3.23
LED4: R9.2 U3.25 | length 19.9
  Top Layer w0.2: R9.2 32,19.5 33.5,21 44.5,21 47.3,23.8 U3.25
LED5: R10.2 U3.26 | length 18.2
  Top Layer w0.2: R10.2 34,19.25 35.25,20.5 44.5,20.5 47.7,23.7 U3.26
"Left Motor Control 1": H2.6 H3.5 H3.6 U3.12 | length 76.9
  Top Layer w0.2: v1(33,38) 33,37 40.6,29.4 U3.12 ; H3.6 H3.5
  Bottom Layer w0.2: v1(33,38) 33,43.75 45.5,56.25 45.5,57.25 46.25,58 48.33,58 H2.6 51.33,55 62.5,55 65.5,58 75.33,58 H3.6
"Left Motor Control 2": H2.8 H3.7 H3.8 U3.11 | length 70.4
  Top Layer w0.2: v1(34,38) 34,36.975 41.175,29.8 U3.11 ; H3.8 H3.7
  Bottom Layer w0.2: v1(34,38) 34,43.87 H2.8 49.54,54.25 71.38,54.25 H3.8
"Motor 1 PWM": H1.3 U3.7 | length 39.3
  Top Layer w0.2: H1.3 23.92,58.25 23.92,54.83 34.61,44.14 34.61,37.312 37.062,34.86 38.14,34.86 41.6,31.4 U3.7
"Motor 2 PWM": H1.4 U3.6 | length 35.4
  Top Layer w0.2: H1.4 25.04,55.21 34.93,45.32 34.93,37.445 37.195,35.18 38.32,35.18 41.7,31.8 U3.6
"Motor 3 PWM": H2.3 U3.4 | length 43.8
  Top Layer w0.2: U3.4 43.15,32.6 40.25,35.5 37.328,35.5 35.25,37.578 35.25,45.608 39.352,49.71 45.71,49.71 50.75,54.75 50.75,58.08 H2.3
"Motor 4 PWM": H2.4 U3.3 | length 41
  Top Layer w0.2: U3.3 43.25,33 40.39,35.86 37.42,35.86 35.61,37.67 35.61,45.515 39.485,49.39 46.64,49.39 52.04,54.79 H2.4
"Motor 5 PWM": H3.3 U3.2 | length 69.9
  Top Layer w0.2: U3.2 43.35,33.4 40.57,36.18 37.553,36.18 35.93,37.803 35.93,45.383 39.617,49.07 73.82,49.07 77.75,53 77.75,58.08 H3.3
"Motor 6 PWM": H3.4 U3.1 | length 66.8
  Top Layer w0.2: U3.1 43.45,33.8 40.75,36.5 37.685,36.5 36.25,37.935 36.25,45.25 39.75,48.75 74.25,48.75 79.04,53.54 H3.4
NetC7_2: C7.2 R5.2 Y1.3 | length 3.3
  Top Layer w0.2: Y1.3 52.425,17.85 C7.2 R5.2
NetD1_1: D1.1 R6.1 | length 1.7
  Top Layer w0.2: D1.1 R6.1
NetD2_1: D2.1 R7.1 | length 1.7
  Top Layer w0.2: D2.1 R7.1
NetD3_1: D3.1 R8.1 | length 1.7
  Top Layer w0.2: D3.1 R8.1
NetD4_1: D4.1 R9.1 | length 1.7
  Top Layer w0.2: D4.1 R9.1
NetD5_1: D5.1 R10.1 | length 1.7
  Top Layer w0.2: D5.1 R10.1
NetD6_1: D6.1 R11.1 | length 2.3
  Top Layer w0.2: D6.1 68.55,14.9 68.775,14.675 R11.1
NetR1_1: R1.1 X1.B5 | length 9.7
  Top Layer w0.2: R1.1 92.25,53 94,51.25 94,48 92.625,46.625 X1.B5
NetR4_2: R4.2 X1.A5 | length 10.1
  Top Layer w0.2: R4.2 88.25,39 87.5,39.75 87.5,44.25 88.625,45.375 X1.A5
NetR14_1: R14.1 S2.2 | length 6.6
  Bottom Layer w0.2: S2.2@69.25,31.75 72.425,31.75 R14.1 72.575,31.75 S2.2@75.75,31.75
"NRF CE": H16.1 U3.42 | length 28.6
  Top Layer w0.2: H16.1 53.6,7.85 58.987,13.237 58.987,26.513 58.5,27 56.75,27 56.35,26.6 U3.42
"NRF CS": H16.2 U3.40 | length 24.4
  Top Layer w0.2: H16.2 51.06,6.81 57.5,13.25 57.5,20 53.3,24.2 U3.40
"NRF INT": H16.5 U3.37 | length 29.8
  Top Layer w0.2: H16.5 43.44,9.44 45.5,11.5 52,11.5 55,14.5 55,20.25 52.1,23.15 U3.37
"NRF MISO": H16.6 U3.36 | length 32
  Top Layer w0.2: H16.6 40.9,10.65 42.5,12.25 51.75,12.25 54.25,14.75 54.25,20.25 51.7,22.8 U3.36
"NRF MOSI": H16.3 U3.39 | length 26.7
  Top Layer w0.2: H16.3 48.52,8.77 49.76,10.01 53.01,10.01 56.5,13.5 56.5,20.25 52.9,23.85 U3.39
"NRF SCK": H16.4 U3.38 | length 28.3
  Top Layer w0.2: H16.4 45.98,9.23 47.5,10.75 52.5,10.75 55.75,14 55.75,20.25 52.5,23.5 U3.38
QSPI_SCLK: U1.6 U3.71 | length 7.6
  Top Layer w0.2: U1.6 47.635,40.865 48,40.5 48,37.547 49.3,36.247 U3.71
QSPI_SD0: U1.5 U3.72 | length 5.8
  Top Layer w0.2: U1.5 47.025,39.595 47.25,39.37 47.25,37.75 48.9,36.1 U3.72
QSPI_SD1: U1.2 U3.74 | length 17.1
  Top Layer w0.2: U1.2 38.135,42.135 37.75,41.75 37.75,39 38.75,38 46,38 48.09,35.91 48.09,35.01 U3.74
QSPI_SD2: U1.3 U3.73 | length 12.1
  Top Layer w0.2: U1.3 39.566,40.75 43.75,40.75 48.49,36.01 48.49,35.01 U3.73
QSPI_SD3: U1.7 U3.70 | length 9.2
  Top Layer w0.2: U1.7 47.865,42.135 48.5,41.5 48.5,37.5 49.7,36.3 U3.70
QSPI_SS: R13.2 U1.1 U3.75 | length 53.6
  Top Layer w0.2: v1(41.25,43.25) 39.606,43.25 U1.1 38.155,43.405 37.25,42.5 37.25,39 38.57,37.68 45.82,37.68 47.7,35.8 U3.75
  Bottom Layer w0.2: v1(41.25,43.25) 61,43.25 65.425,38.825 R13.2
Relay_EN: H15.1 U3.48 | length 31.5
  Top Layer w0.2: U3.48 56.25,29 56.75,28.5 58.5,28.5 61,26 61,11.54 H15.1
Relay_FB: H15.2 U3.47 | length 29.9
  Top Layer w0.2: U3.47 56.15,28.6 56.57,28.18 58.32,28.18 60.25,26.25 60.25,11 65,6.25 H15.2
"Right Motor Control 1": H1.5 H1.6 H2.5 U3.14 | length 72.9
  Top Layer w0.2: U3.14 39.65,28.6 31.25,37 31.25,46.25 22.5,55 H1.6 H1.5 22.5,60.5 23,61 40.25,61 43.25,58 48.13,58 H2.5
"Right Motor Control 2": H1.7 H1.8 H2.7 U3.13 | length 74.5
  Top Layer w0.2: H1.8 H1.7 20.15,59.56 20.15,60.4 21.5,61.75 45.75,61.75 46.96,60.54 H2.7 ; v1(32,38) 32,37.25 40.25,29 U3.13
  Bottom Layer w0.2: H1.8 21.439,56.83 21.55,56.719 21.55,56.436 22.106,55.88 22.87,55.88 32,46.75 v1(32,38)
RP2350_D_N: R2.1 X1.A7 X1.B7 | length 19.9
  Top Layer w0.23: R2.1 ccw(c86.496,46.75) 86.496,46.179 86.929,46.179 ccw(c86.929,46.5) v1(87.25,46.5) ccw(c87.446,46.5) 87.446,46.304 89.964,46.304 ccw(c89.964,46.375) X1.A7 ; X1.B7 cw(c91.706,45.625) 91.706,45.696 92.804,45.696 cw(c92.804,45.25) v1(93.25,45.25)
  Bottom Layer w0.23: v1(87.25,46.5) ccw(c87.446,46.5) 87.446,46.304 90.196,46.304 ccw(c90.196,46.75) 90.643,46.75 cw(c91.75,46.75) 91.75,47.857 94.5,47.857 cw(c94.5,46.75) 95.607,46.75 cw(c94.429,46.75) 94.429,45.571 93.571,45.571 ccw(c93.571,45.25) v1(93.25,45.25)
RP2350_D_P: R3.1 X1.A6 X1.B6 | length 18.9
  Top Layer w0.23: R3.1 cw(c86.496,45.25) 86.496,45.821 86.929,45.821 cw(c86.929,45.5) v1(87.25,45.5) cw(c87.696,45.5) 87.696,45.946 89.964,45.946 cw(c89.964,45.875) X1.A6 ; X1.B6 ccw(c91.706,46.125) 91.706,46.054 93.054,46.054 ccw(c93.054,46.25) v1(93.25,46.25)
  Bottom Layer w0.23: v1(87.25,45.5) cw(c87.696,45.5) 87.696,45.946 90.196,45.946 ccw(c90.196,46.75) 91,46.75 cw(c91.75,46.75) 91.75,47.5 94.5,47.5 cw(c94.5,46.75) 95.25,46.75 cw(c94.429,46.75) 94.429,45.929 93.571,45.929 cw(c93.571,46.25) v1(93.25,46.25)
RP2350_DX_N: R2.2 U3.66 | length 52.1
  Top Layer w0.23: U3.66 cw(c51.3,35.021) 51.279,35.021 51.279,44.529 cw(c52.5,44.529) 52.5,45.75 56.5,45.75 cw(c56.5,45.5) v1(56.75,45.5) ; v1(83.25,46.5) ccw(c83.571,46.5) 83.571,46.179 84.004,46.179 ccw(c84.004,46.75) R2.2
  Bottom Layer w0.23: v1(56.75,45.5) ccw(c56.429,45.5) 56.429,45.821 55.321,45.821 cw(c55.321,47) 54.143,47 cw(c55.25,47) 55.25,48.107 57.25,48.107 cw(c57.25,46.75) 58.607,46.75 ccw(c59.107,46.75) 59.107,46.25 83,46.25 ccw(c83,46.5) v1(83.25,46.5)
RP2350_DX_P: R3.2 U3.67 | length 51.7
  Top Layer w0.23: U3.67 ccw(c50.9,35.021) 50.921,35.021 50.921,44.529 cw(c52.5,44.529) 52.5,46.107 56.357,46.107 ccw(c56.357,46.5) v1(56.75,46.5) ; v1(83.25,45.5) cw(c83.571,45.5) 83.571,45.821 84.004,45.821 cw(c84.004,45.25) R3.2
  Bottom Layer w0.23: v1(56.75,46.5) cw(c56.429,46.5) 56.429,46.179 55.321,46.179 cw(c55.321,47) 54.5,47 cw(c55.25,47) 55.25,47.75 57.25,47.75 cw(c57.25,46.75) 58.25,46.75 ccw(c59.107,46.75) 59.107,45.893 82.857,45.893 cw(c82.857,45.5) v1(83.25,45.5)
RUN: S2.1 U3.35 | length 28.5
  Top Layer w0.2: v1(51.25,26.25) 51.29,26.21 51.29,25.01 U3.35
  Bottom Layer w0.2: v1(51.25,26.25) 54,23.5 65.5,23.5 69.25,27.25 S2.1@75.75,27.25
SCL0: H14.2 R16.1 U3.46 | length 45.3
  Top Layer w0.2: H14.2 30.413,5 30.781,5.368 30.868,5.368 41,15.5 v1(41,19) ; v1(53,28.25) 53.04,28.21 54.49,28.21 U3.46
  Bottom Layer w0.2: H14.2 R16.1 ; v1(41,19) 41,23.7 45.55,28.25 v1(53,28.25)
SCL1: H9.2 H13.2 R18.1 U3.9 | length 88.1
  Top Layer w0.2: H9.2 9,23.25 10.5,21.75 10.5,4.75 11.75,3.5 14.5,3.5 H13.2 16,19 21.25,24.25 43.5,24.25 45.75,26.5 45.75,30.25 45.4,30.6 U3.9
  Bottom Layer w0.2: H13.2 R18.1
SDA0: H14.1 R15.1 U3.45 | length 42.9
  Top Layer w0.2: H14.1 42,14.46 v1(42,19) ; v1(53,27.25) 53.55,27.8 U3.45
  Bottom Layer w0.2: R15.1 32.5,8.825 32.54,8.785 H14.1 ; v1(42,19) 42,23.25 46,27.25 v1(53,27.25)
SDA1: H9.1 H13.1 R17.1 U3.8 | length 87.8
  Top Layer w0.2: H9.1 8.04,20.71 9.25,19.5 9.25,4.75 11.25,2.75 16.29,2.75 H13.1 18.54,19.29 23,23.75 43.5,23.75 46.25,26.5 46.25,30.5 45.75,31 U3.8
  Bottom Layer w0.2: R17.1 18.5,8.825 18.54,8.785 H13.1
"Servo 1 PWM": U2.3 U3.18 | length 39.4
  Top Layer w0.2: U2.3 21.025,41.975 22.75,40.25 22.75,29.203 26.563,25.39 41.64,25.39 43.25,27 U3.18
"Servo 1 PWM (Vcontrol)": H4.1 U2.2 | length 14.6
  Top Layer w0.2: H4.1 6.335,42.625 U2.2
"Servo 2 PWM": U2.5 U3.19 | length 38.4
  Top Layer w0.2: U2.5 20.825,40.675 22.25,39.25 22.25,29.25 26.43,25.07 41.867,25.07 43.397,26.6 U3.19
"Servo 2 PWM (Vcontrol)": H5.1 U2.4 | length 13.2
  Top Layer w0.2: v1(17.5,41.25) 17.538,41.288 U2.4@19.038,41.288
  Bottom Layer w0.2: H5.1 12.96,49.04 15.25,46.75 15.25,43.5 v1(17.5,41.25)
"Servo 3 PWM": U2.7 U3.20 | length 37.4
  Top Layer w0.2: U2.7 20.727,39.375 21.75,38.352 21.75,29.25 26.25,24.75 42,24.75 43.45,26.2 U3.20
"Servo 3 PWM (Vcontrol)": H6.1 U2.6 | length 19.2
  Top Layer w0.2: H6.1 6.21,32.96 8,34.75 8,38.5 9.525,40.025 U2.6
"Servo 4 PWM": U2.9 U3.17 | length 34.3
  Top Layer w0.2: U2.9 23.725,38.725 23.25,38.25 23.25,29.155 26.695,25.71 41.46,25.71 43.15,27.4 U3.17
"Servo 4 PWM (Vcontrol)": H7.1 U2.10 | length 18.1
  Top Layer w0.2: U2.10 24.988,39.312 26.688,39.312 v1(26.75,39.25)
  Bottom Layer w0.2: H7.1 25.54,38.04 v1(26.75,39.25)
U\S\B\_\B\O\O\T\: R13.1 S1.1 | length 6.6
  Bottom Layer w0.2: S1.1@69.25,40.25 72.425,40.25 R13.1 72.575,40.25 S1.1@75.75,40.25
"UART0 RX": H8.2 U3.56 | length 41.1
  Top Layer w0.2: U3.56 55.45,32.2 56,32.75 62.875,32.75 63.875,33.75 86.75,33.75 89,31.5 H8.2
"UART0 TX": H8.3 U3.55 | length 41.9
  Top Layer w0.2: U3.55 55.55,31.8 56,32.25 63,32.25 64,33.25 86.25,33.25 90.54,28.96 H8.3
"UART1 RX": H10.2 U3.52 | length 45.7
  Top Layer w0.2: U3.52 54.51,30.61 55.61,30.61 56.75,31.75 64.75,31.75 66.75,29.75 80.75,29.75 92.5,18 H10.2
"UART1 TX": H10.3 U3.49 | length 45.3
  Top Layer w0.2: U3.49 56.6,29.4 57.05,28.95 80.3,28.95 93.79,15.46 H10.3
Vcontrol: C3.1 J1.2 U2.16 | length 6.9
  Top Layer w0.2: C3.1 25.425,44.725 24.925,44.225 U2.16 25.05,43.15 28.85,43.15 29,43 J1.2
VREG_AVDD: R12.1 U3.61 | length 8.4
  Top Layer w0.2: U3.61 53.3,36.05 53.5,36.25 56.75,36.25 v1(58.5,38)
  Bottom Layer w0.2: v1(58.5,38) R12.1
VREG_LX: L2.2 U3.63 | length 6.4
  Top Layer w0.2: U3.63 52.5,36.5 53.165,37.165 54.665,37.165 v1(55.5,38)
  Bottom Layer w0.23: v1(55.5,38) L2.2
Vservo: H4.2 H5.2 H6.2 H7.2 X2.2 | length 89
  Bottom Layer w1: H7.2 24.75,35.5 31,29.25 31,22.75 42.75,11 78.5,11 81,8.5 X2.2@81,4.5
XIN: C6.2 U3.30 Y1.1 | length 13
  Top Layer w0.2: C6.2 48.851,20.175 Y1.1 49.3,20.575 49.3,21.305 49.3,21.405 ccw(c49.1,21.405) 49.1,21.605 48.25,21.605 cw(c48.25,21.805) 48.25,22.005 49.18,22.005 ccw(c49.18,22.205) 49.18,22.405 48.073,22.405 cw(c48.073,22.605) 48.073,22.805 49.18,22.805 ccw(c49.18,23.005) 49.18,23.205 48.781,23.205 cw(c48.781,23.405) 48.781,23.605 49.1,23.605 ccw(c49.1,23.805) 49.3,23.805 U3.30
XOUT: R5.1 U3.31 | length 6.3
  Top Layer w0.2: U3.31 49.7,22.129 ccw(c49.89,22.129) 49.755,21.995 50.345,21.405 ccw(c50.479,21.54) 50.479,21.35 51.8,21.35 52.475,20.675 R5.1
pads on no net: U2.12 U2.15 U3.27 U3.28 U3.33 U3.34 U3.43 U3.44 U3.53 U3.54 U3.57 U3.58 U3.59 U3.77 U3.78 U3.79 U3.80 U4.8 U5.8 X1.A2 X1.A3 X1.A8 X1.A10 X1.A11 X1.B2 X1.B3 X1.B8 X1.B10 X1.B11

## Polygon pours and split planes (outlines as drawn)
+1V1 on Power Layer "+1V1 Poly" (solid, shelved, pour order 9): 55.5,24.25 56.5,24.25 56.5,37 42.5,37 42.5,24.25 43.5,24.25 43.5,36 55.5,36
Vservo on Power Layer "+8V4 Power Poly" (solid, remove dead copper, shelved, pour order 10): 0.69,51.835 15.31,51.835 15.31,46 28,46 28,38.2 27.84,38.04 15.31,38.04 15.31,30.165 0.69,30.165
Earth on Power Layer "Earth Power Poly" (solid, remove dead copper, shelved, pour order 11): 0,8.5 8,8.5 8,3.5 72,3.5 72,8.5 95.5,8.5 95.5,40 89,40 89,52 95.5,52 95.5,55.5 91,55.5 91,60.5 8,60.5 8,55.5 0,55.5 0,64 99,64 99,0 0,0
+3V3 on Power Layer "+3V3 Power Poly" (solid, remove dead copper, shelved, pour order 12): 0,64 0,0 99,0 99,64
GND on Bottom Layer "Bottom GND Poly" (hatched 45Degree grid 0.508 track 0.203, remove dead copper, shelved, pour order 13): 0,64 99,64 99,0 0,0
GND on Ground Layer "GND Power Poly" (solid, remove dead copper, shelved, pour order 8): 0,64 99,64 99,0 0,0
GND on Top Layer "Top GND Poly" (hatched 45Degree grid 0.508 track 0.203, remove dead copper, shelved, pour order 7): 0,64 99,64 99,0 0,0

## Keep-outs
Keep-Out Layer:
  the board outline again, w0.2

## Silkscreen, mask and mechanical layers (free items; w line width, h text height)
Top Overlay:
  drawing of 13 lines, arcs and shapes, not listed
  text "SERVOS" at 4.601,52.3 h1.2
  text "M1 - M2" at 18.601,51 h1.2
  text "M3 - M4" at 45.101,51 h1.2
  text "M5 - M6" at 72.501,51 h1.2
  text "1" at 0.99,50.335 h1.2
  text "2" at 14.21,50.335 h1.2
  text "Servo / PWM Voltage" at 27.25,46.29 h1
  text "+3V3" at 31.2,44.04 h1
  text "+5V" at 31.2,38.96 h1
  text "BOOT" at 63.801,37.4 h1.2
  text "3" at 0.99,30.465 h1.2
  text "4" at 14.21,30.465 h1.2
  text "RESET" at 62.602,28.9 h1.2
  text "SENSOR" at 90.91,28.101 h1.2 r90
  text "V1" at 16.5,25.25 h1.5
  text "LIGHT" at 9.29,20.551 h1.2 r90
  text "PWR" at 68.1,15.75 h1.2 r90
  text "RP2350 / Control / Board" at 12.476,15.091 h1.5
  text "BATT MON" at 90.91,13.441 h1.2 r90
  text "BUZZER" at 9.3,9.601 h1.2 r90
  text "POWER" at 78.201,9.6 h1.2
  text "ESP32" at 13.201,8.09 h1.2
  text "RPI" at 28.6,8.09 h1.2
  text "nRF24L01P" at 42.152,8.09 h1.2
  text "RELAY" at 62.201,8.09 h1.2
Bottom Overlay:
  drawing of 92 lines, arcs and shapes, not listed
  text "MOTORS (1/2)" at 29.098,60.9 h1.2
  text "MOTORS (3/4)" at 56.198,60.9 h1.2
  text "MOTORS (5/6)" at 83.198,60.9 h1.2
  text "R" at 15.7,58.77 h1.2
  text "R" at 42.7,58.77 h1.2
  text "L" at 69.7,58.77 h1.2
  text "R" at 15.7,56.23 h1.2
  text "L" at 42.7,56.23 h1.2
  text "L" at 69.7,56.23 h1.2
  text "M3" at 93,53.9 h1.2
  text "C1" at 21.9,53.431 h1.2 r270
  text "C1" at 48.9,53.431 h1.2 r270
  text "C1" at 75.9,53.431 h1.2 r270
  text "C2" at 19.36,53.031 h1.2 r270
  text "C2" at 46.36,53.031 h1.2 r270
  text "C2" at 73.36,53.031 h1.2 r270
  text "GND" at 16.82,51.831 h1.2 r270
  text "PWM" at 24.44,51.831 h1.2 r270
  text "GND" at 43.82,51.831 h1.2 r270
  text "PWM" at 51.44,51.831 h1.2 r270
  text "GND" at 70.82,51.831 h1.2 r270
  text "PWM" at 78.44,51.831 h1.2 r270
  text "+3V3" at 26.98,50.631 h1.2 r270
  text "+3V3" at 53.98,50.631 h1.2 r270
  text "+3V3" at 80.98,50.631 h1.2 r270
  text "-" at 3.2,48.44 h1.2
  text "S2" at 14.799,48.44 h1.2
  text "Board" at 38.25,47.05 h1.2
  text "+" at 3.2,45.9 h1.2
  text "+" at 13.6,45.9 h1.2
  text "Dim" at 38.25,45.25 h1.2
  text "64mm" at 39.75,44.826 h1.2 r270
  text "S1" at 3.2,43.36 h1.2
  text "-" at 13.6,43.36 h1.2
  text "99mm" at 37.574,42.8 h1.2
  text "SERVO" at 10.799,40.4 h1.2
  text "-" at 3.2,37.44 h1.2
  text "S4" at 14.799,37.44 h1.2
  text "+" at 3.2,34.9 h1.2
  text "+" at 13.6,34.9 h1.2
  text "GND" at 92.2,33.44 h1.2
  text "S3" at 3.2,32.36 h1.2
  text "-" at 13.6,32.36 h1.2
  text "RX" at 92.2,30.9 h1.2
  text "TX" at 92.2,28.36 h1.2
  text "SENSOR" at 95.8,28.101 h1.2 r270
  text "GND" at 9.999,25.19 h1.2
  text "SCL" at 9.999,22.65 h1.2
  text "LIGHT" at 2,20.551 h1.2 r270
  text "SDA" at 9.999,20.11 h1.2
  text "GND" at 92.2,19.94 h1.2
  text "Designed by / Russell MacGregor" at 30.422,19.377 h1
  text "RX" at 92.2,17.4 h1.2
  text "TX" at 92.2,14.86 h1.2
  text "GND" at 9.999,13.67 h1.2
  text "BATT MON" at 95.8,13.401 h1.2 r270
  text "EN" at 8.799,11.13 h1.2
  text "BUZZ" at 2,10.801 h1.2 r270
  text "+5V" at 75.32,7.3 h1.2 r270
  text "V Servo" at 80.4,7.3 h1.2 r270
  text "GND" at 85.48,7.3 h1.2 r270
  text "GND" at 12.86,6.8 h1.2 r270
  text "SCL" at 15.4,6.8 h1.2 r270
  text "SDA" at 17.94,6.8 h1.2 r270
  text "GND" at 26.86,6.8 h1.2 r270
  text "SCL" at 29.4,6.8 h1.2 r270
  text "SDA" at 31.94,6.8 h1.2 r270
  text "MISO" at 40.3,6.8 h1.2 r270
  text "INT" at 42.84,6.8 h1.2 r270
  text "SCK" at 45.38,6.8 h1.2 r270
  text "MOSI" at 47.92,6.8 h1.2 r270
  text "CS" at 50.46,6.8 h1.2 r270
  text "CE" at 53,6.8 h1.2 r270
  text "GND" at 61.86,6.8 h1.2 r270
  text "FB" at 64.4,6.8 h1.2 r270
  text "EN" at 66.94,6.8 h1.2 r270
  text "ESP32" at 18.799,2 h1.2
  text "RPI" at 31.4,2 h1.2
  text "nRF24L01P" at 52.348,2 h1.2
  text "RELAY" at 67.799,2 h1.2
  text "PWR" at 82.599,2 h1.2
Poly Planning:
  lines w0.2: 0,0 99,0 99,64 0,64 0,55.5 8,55.5 8,60.5 91,60.5 91,55.5 95.5,55.5 95.5,52 89,52 89,40 95.5,40 95.5,8.5 72,8.5 72,3.5 8,3.5 8,8.5 0,8.5 0,0 ; 0.6,30 0.6,52 15.3,52 15.3,30 0.6,30 ; 42.5,24.25 43.5,24.25 43.5,36 55.5,36 55.5,24.25 56.5,24.25 56.5,37 42.5,37 42.5,24.25